# Altium PCB RD3399-20181026.PCBDOC (part 1 of 2)
Units mil, origin at the board's own origin, x right, y up, seen from the top; angles counter-clockwise.
Board outline 4930.59 x 3741.42 mil, 4 copper layers (TOP, GND, POWER, BOTTOM), stack 28.234 mil thick; 208 components, 334 nets, 961 pads, 292 vias.
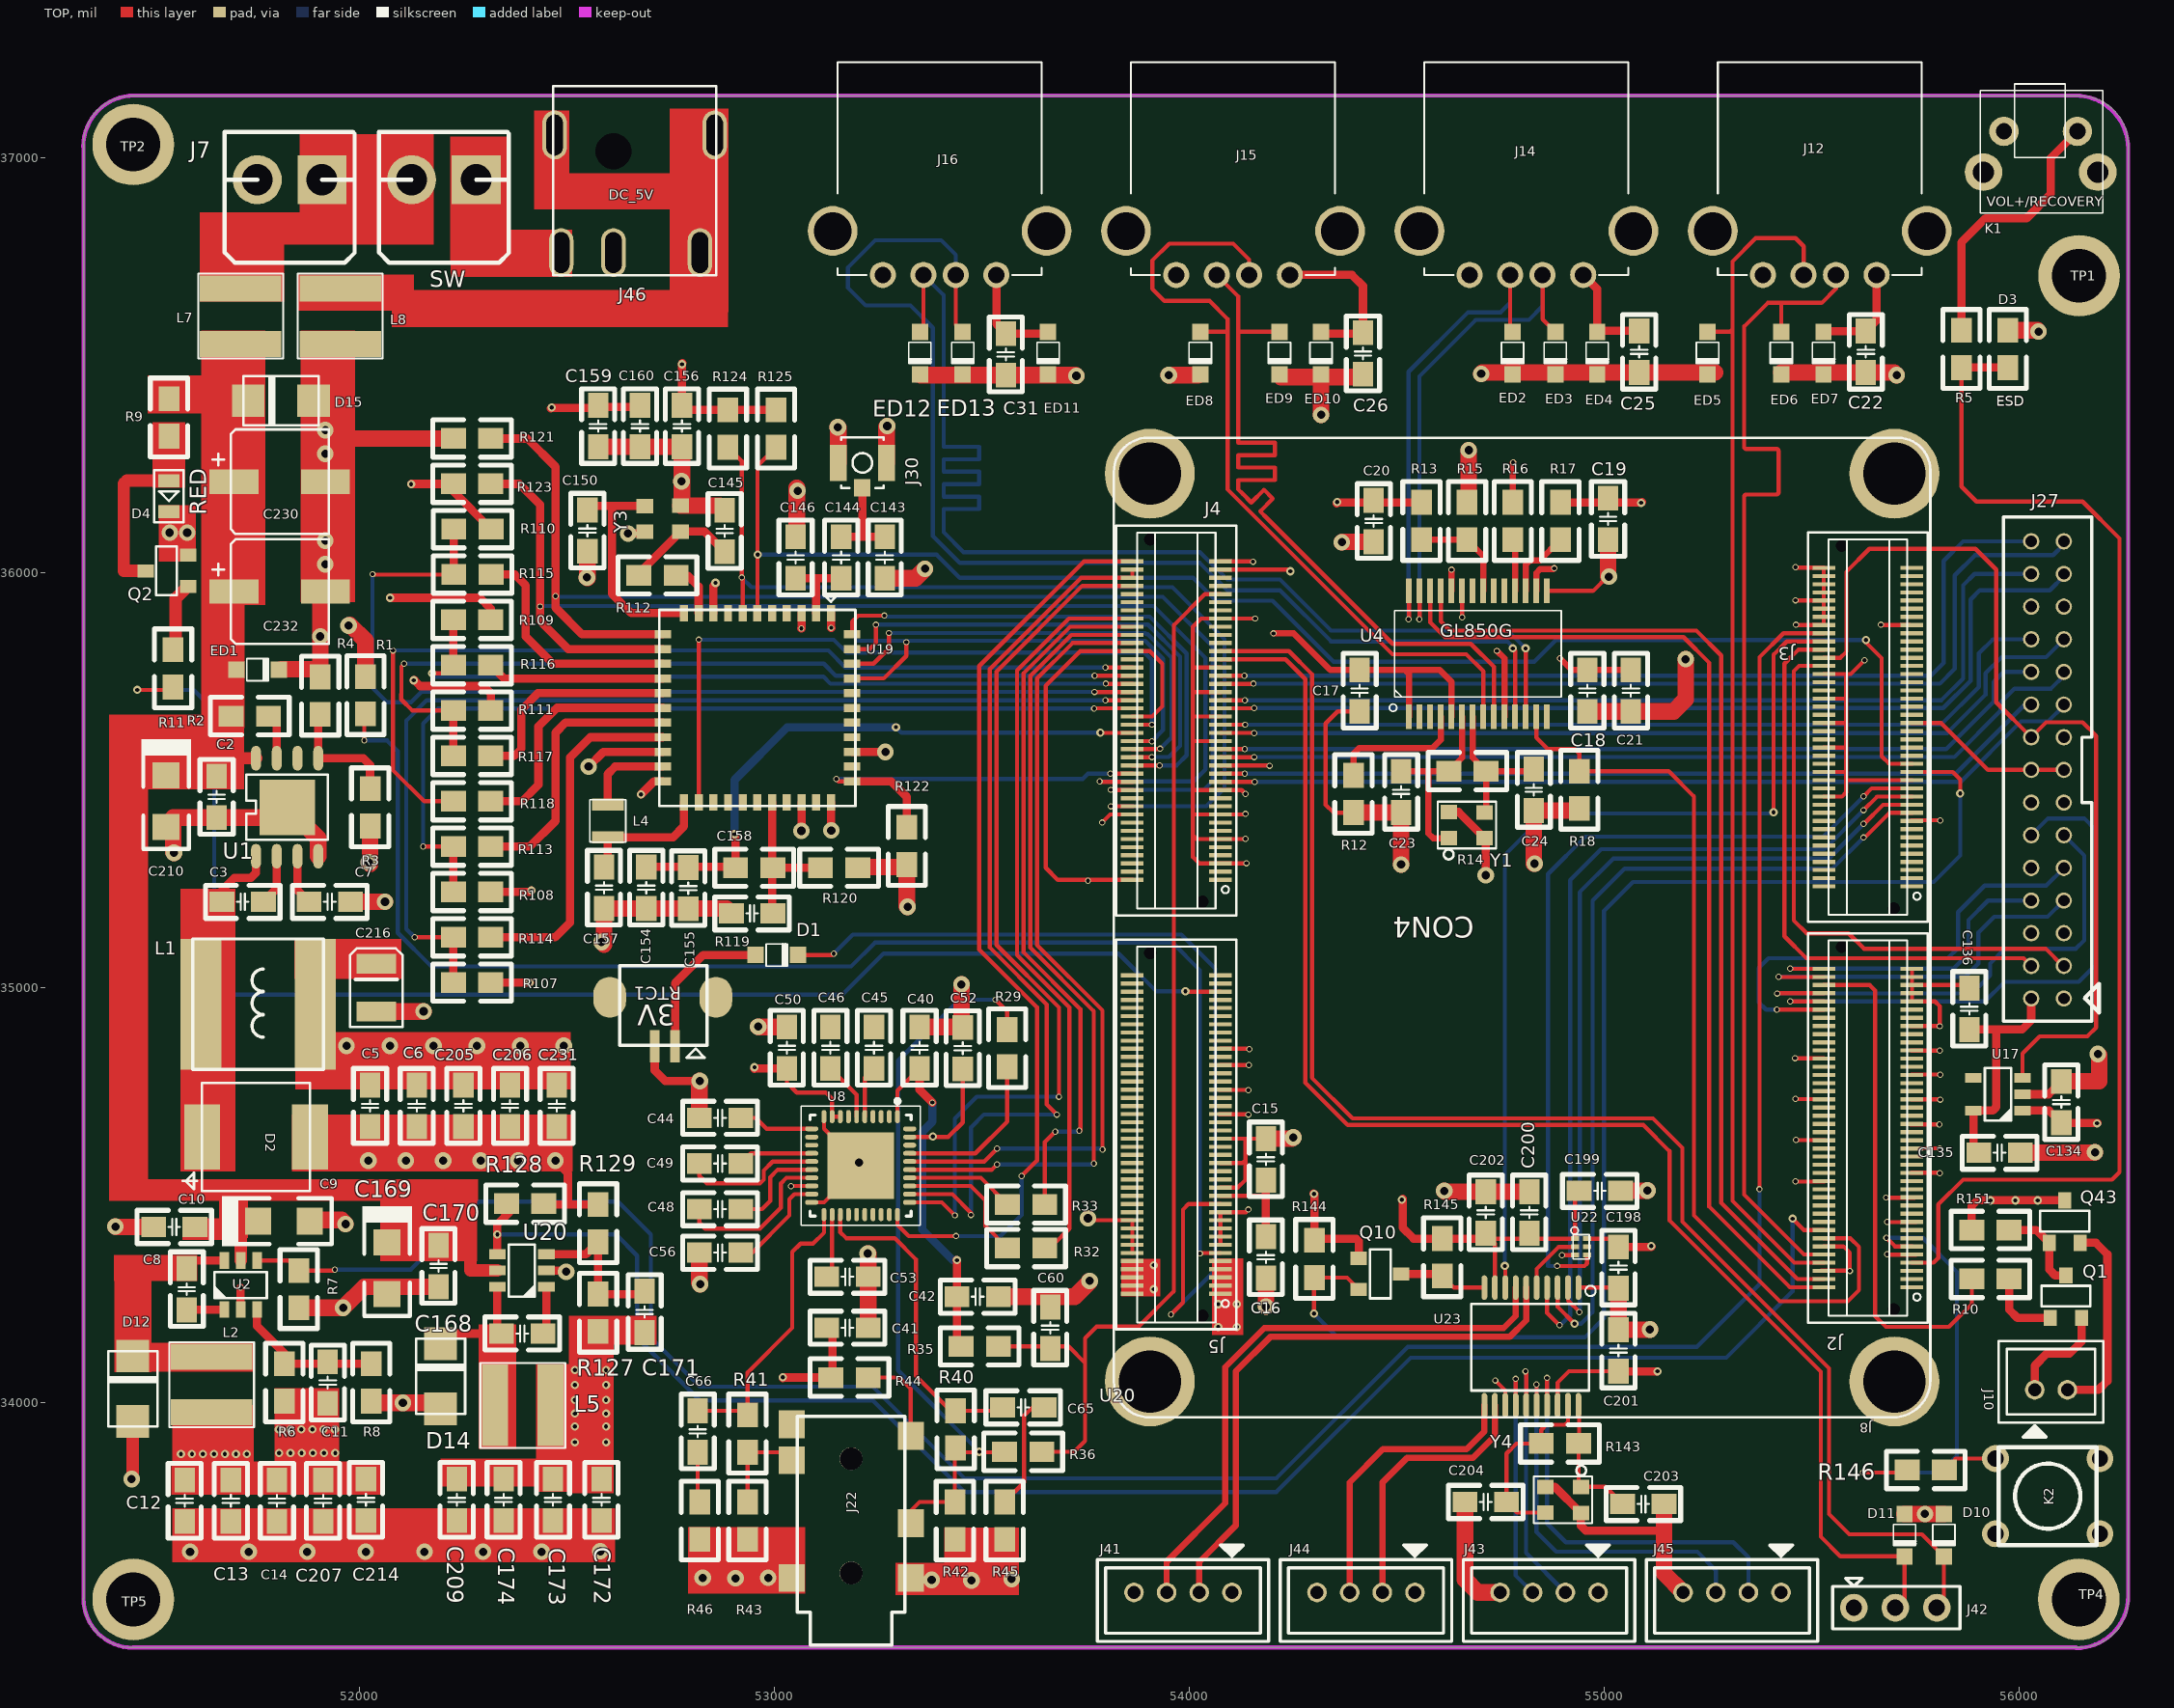
[diagram p0: TOP view]
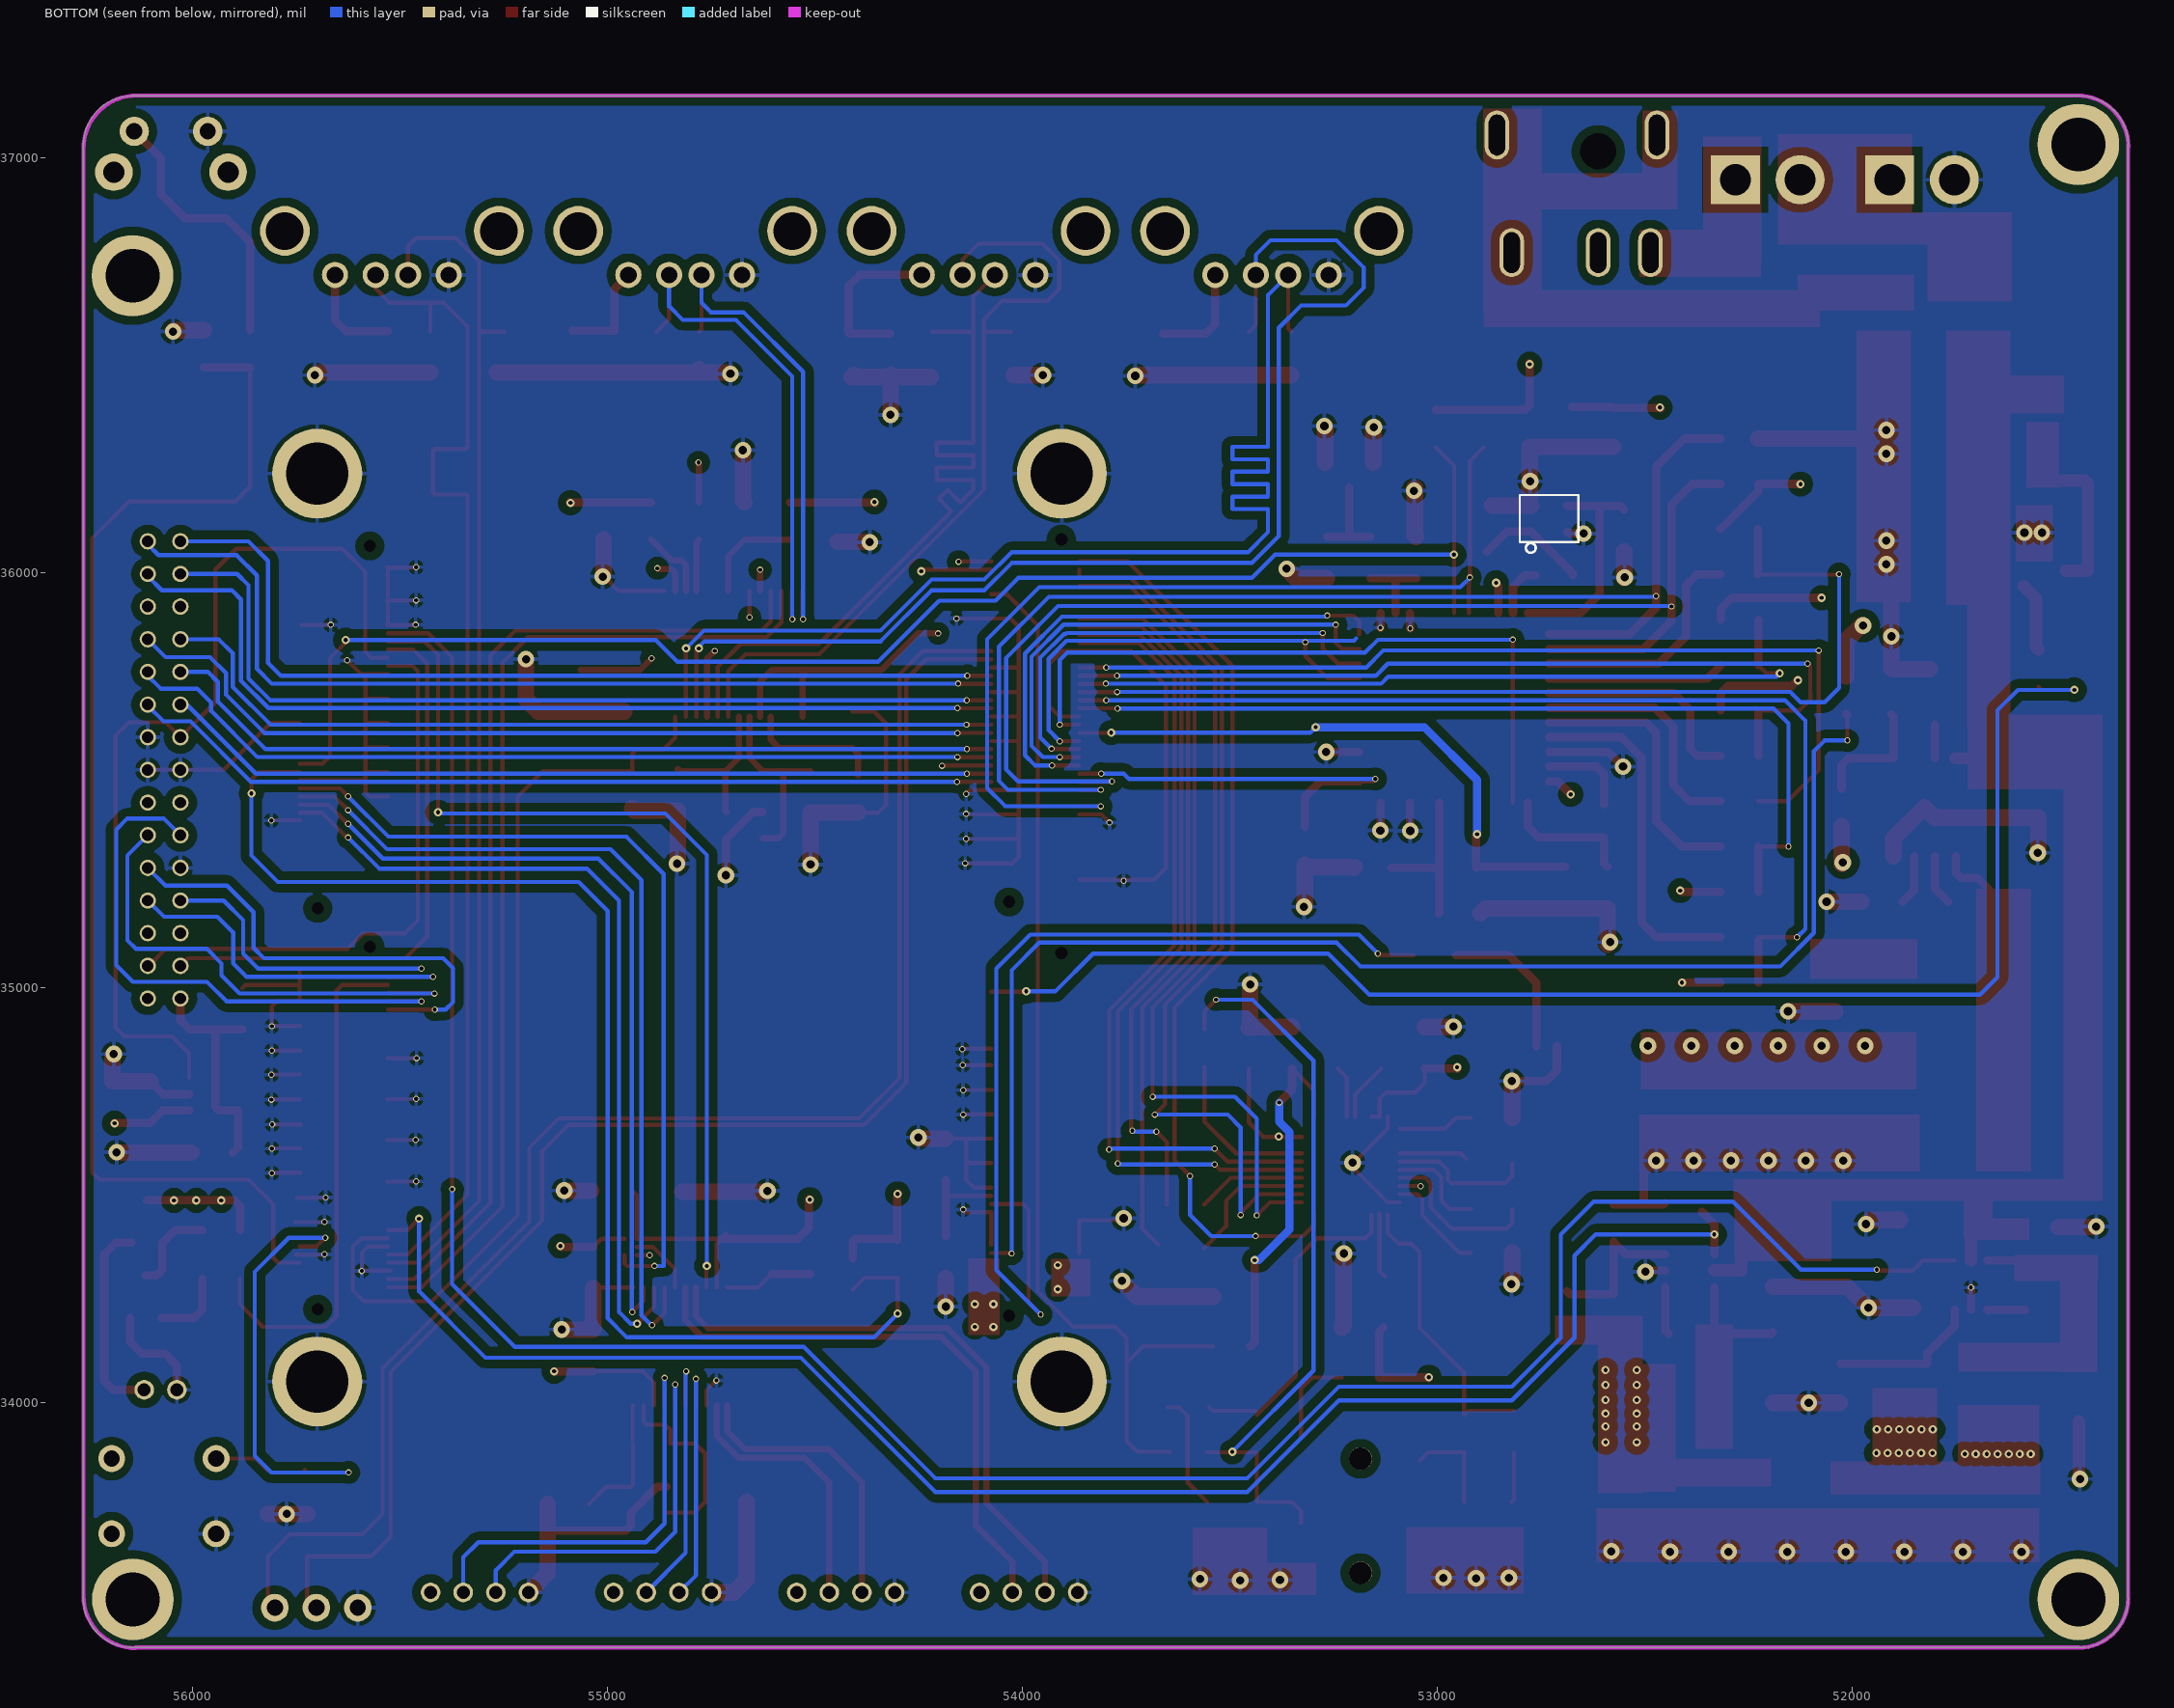
[diagram p1: BOTTOM view, seen from below]
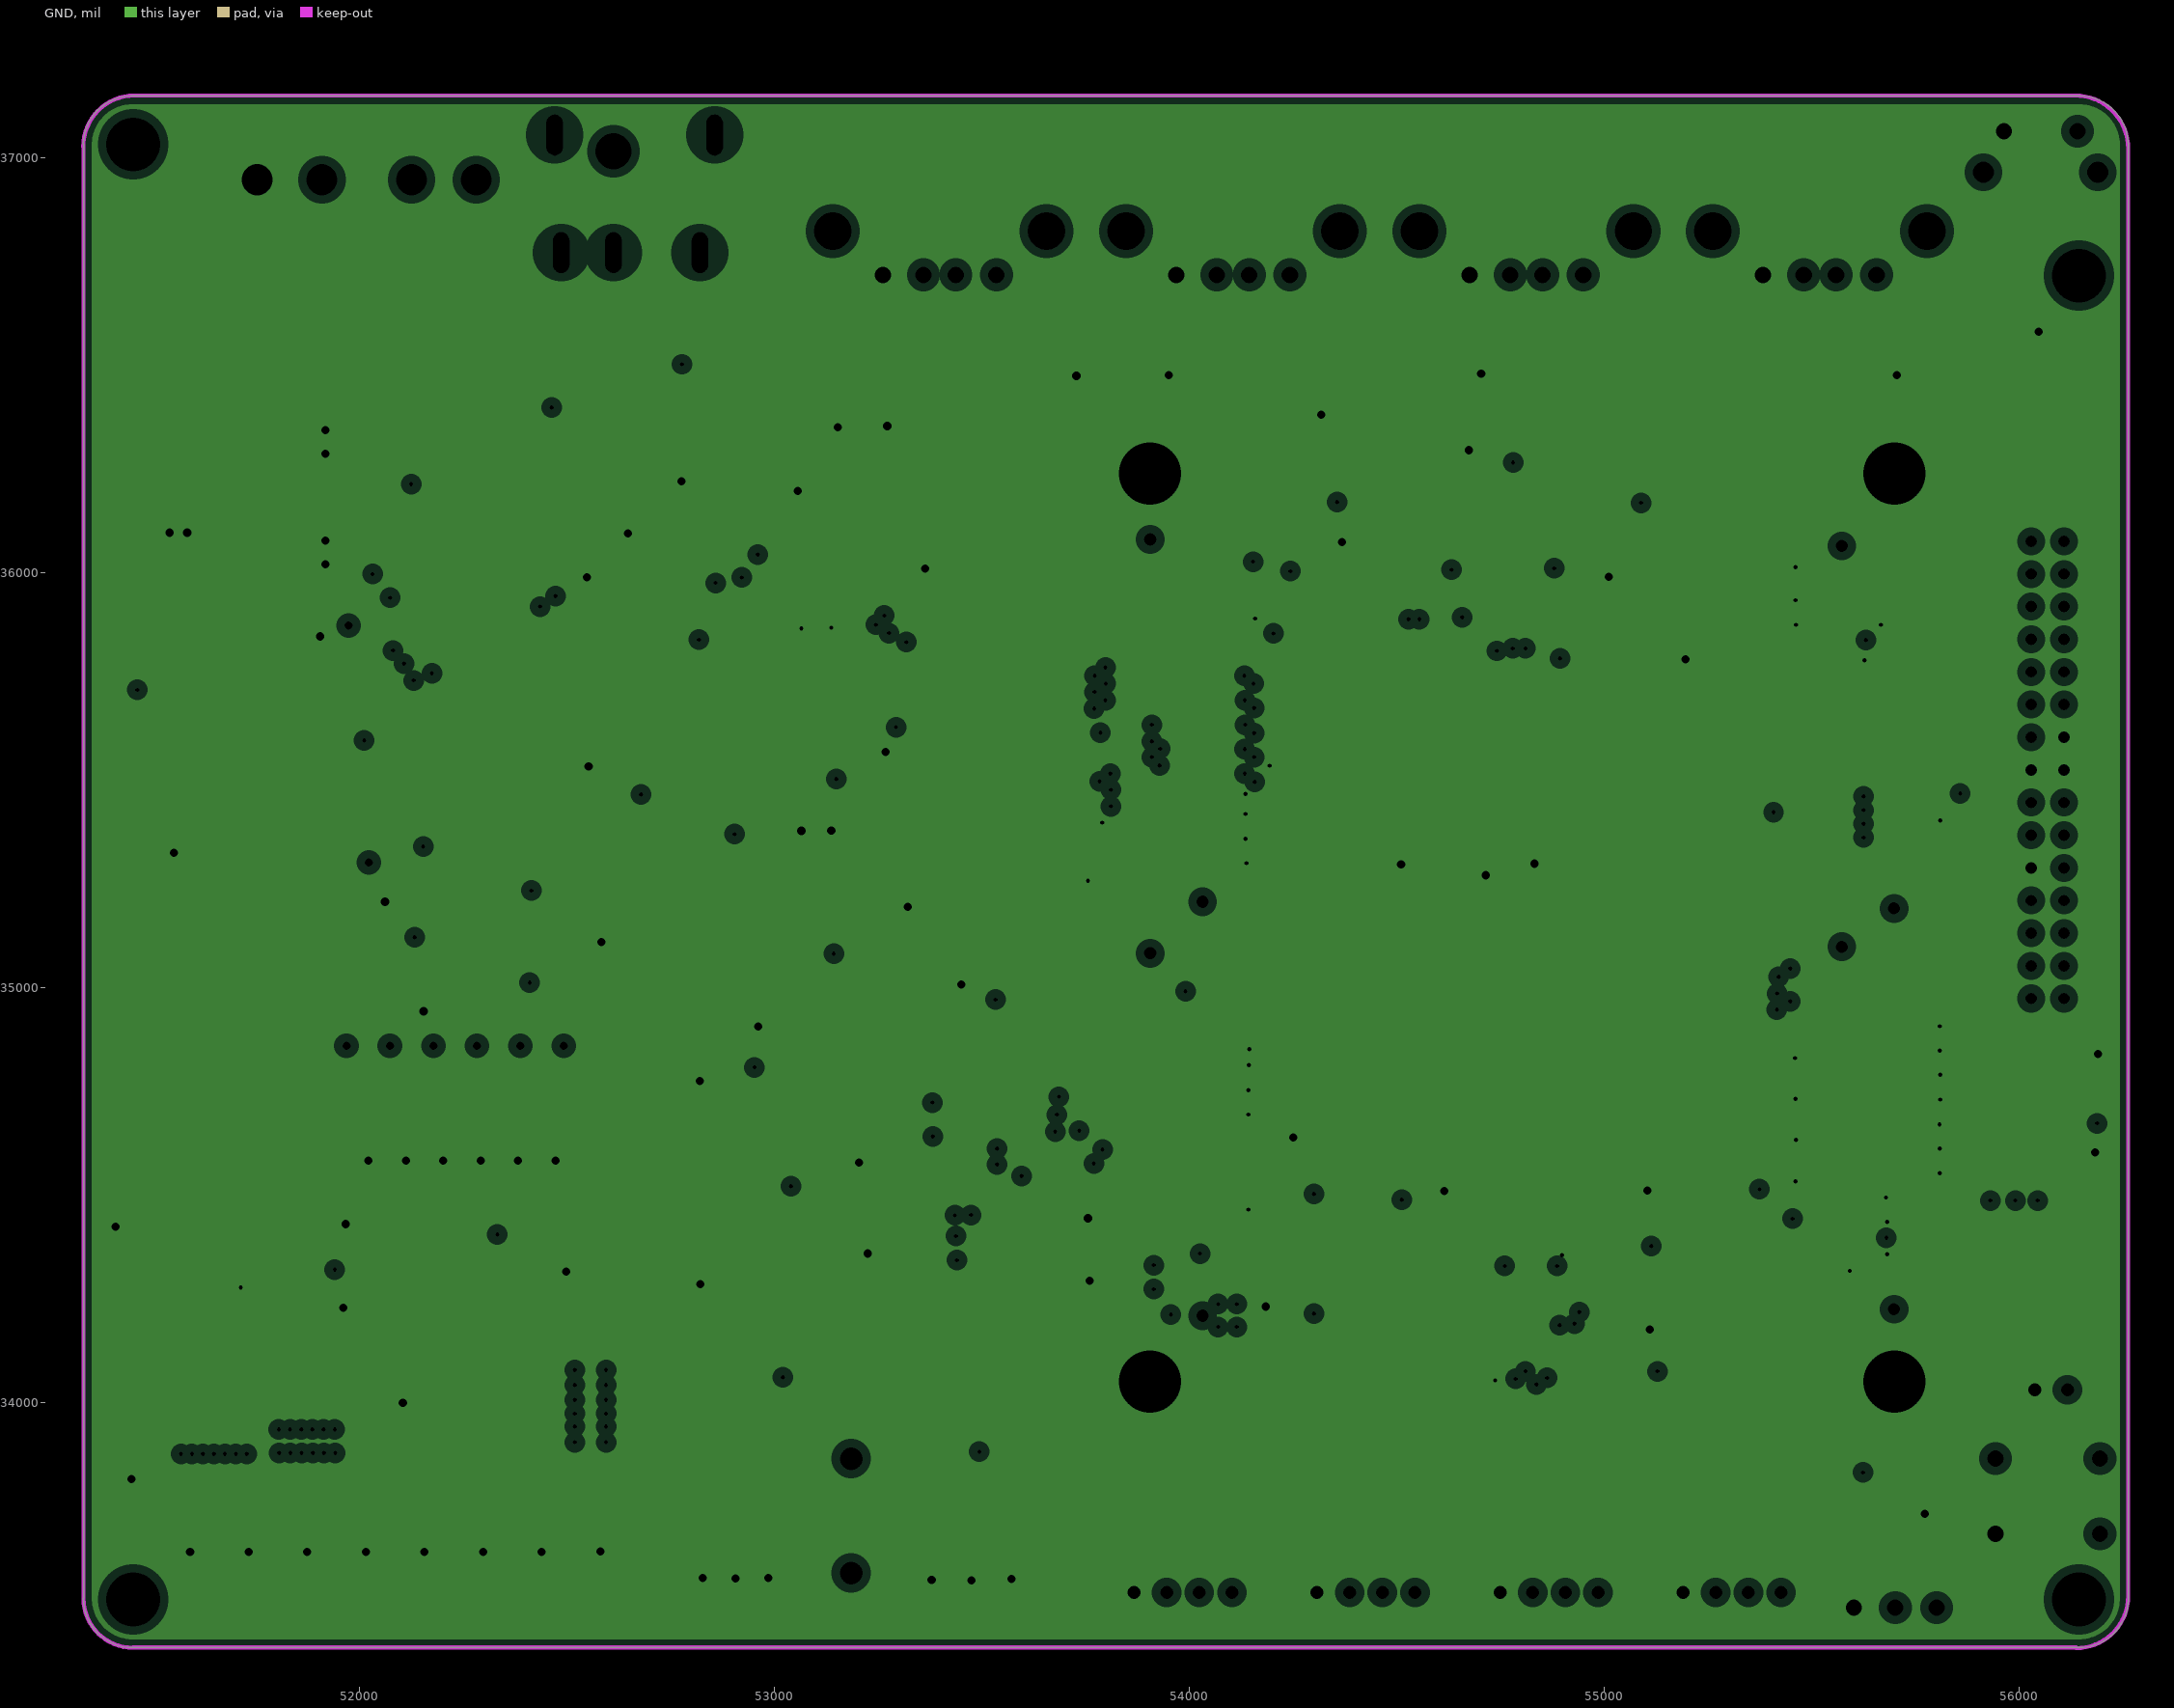
[diagram p2: GND, clearances drawn from the general rule]
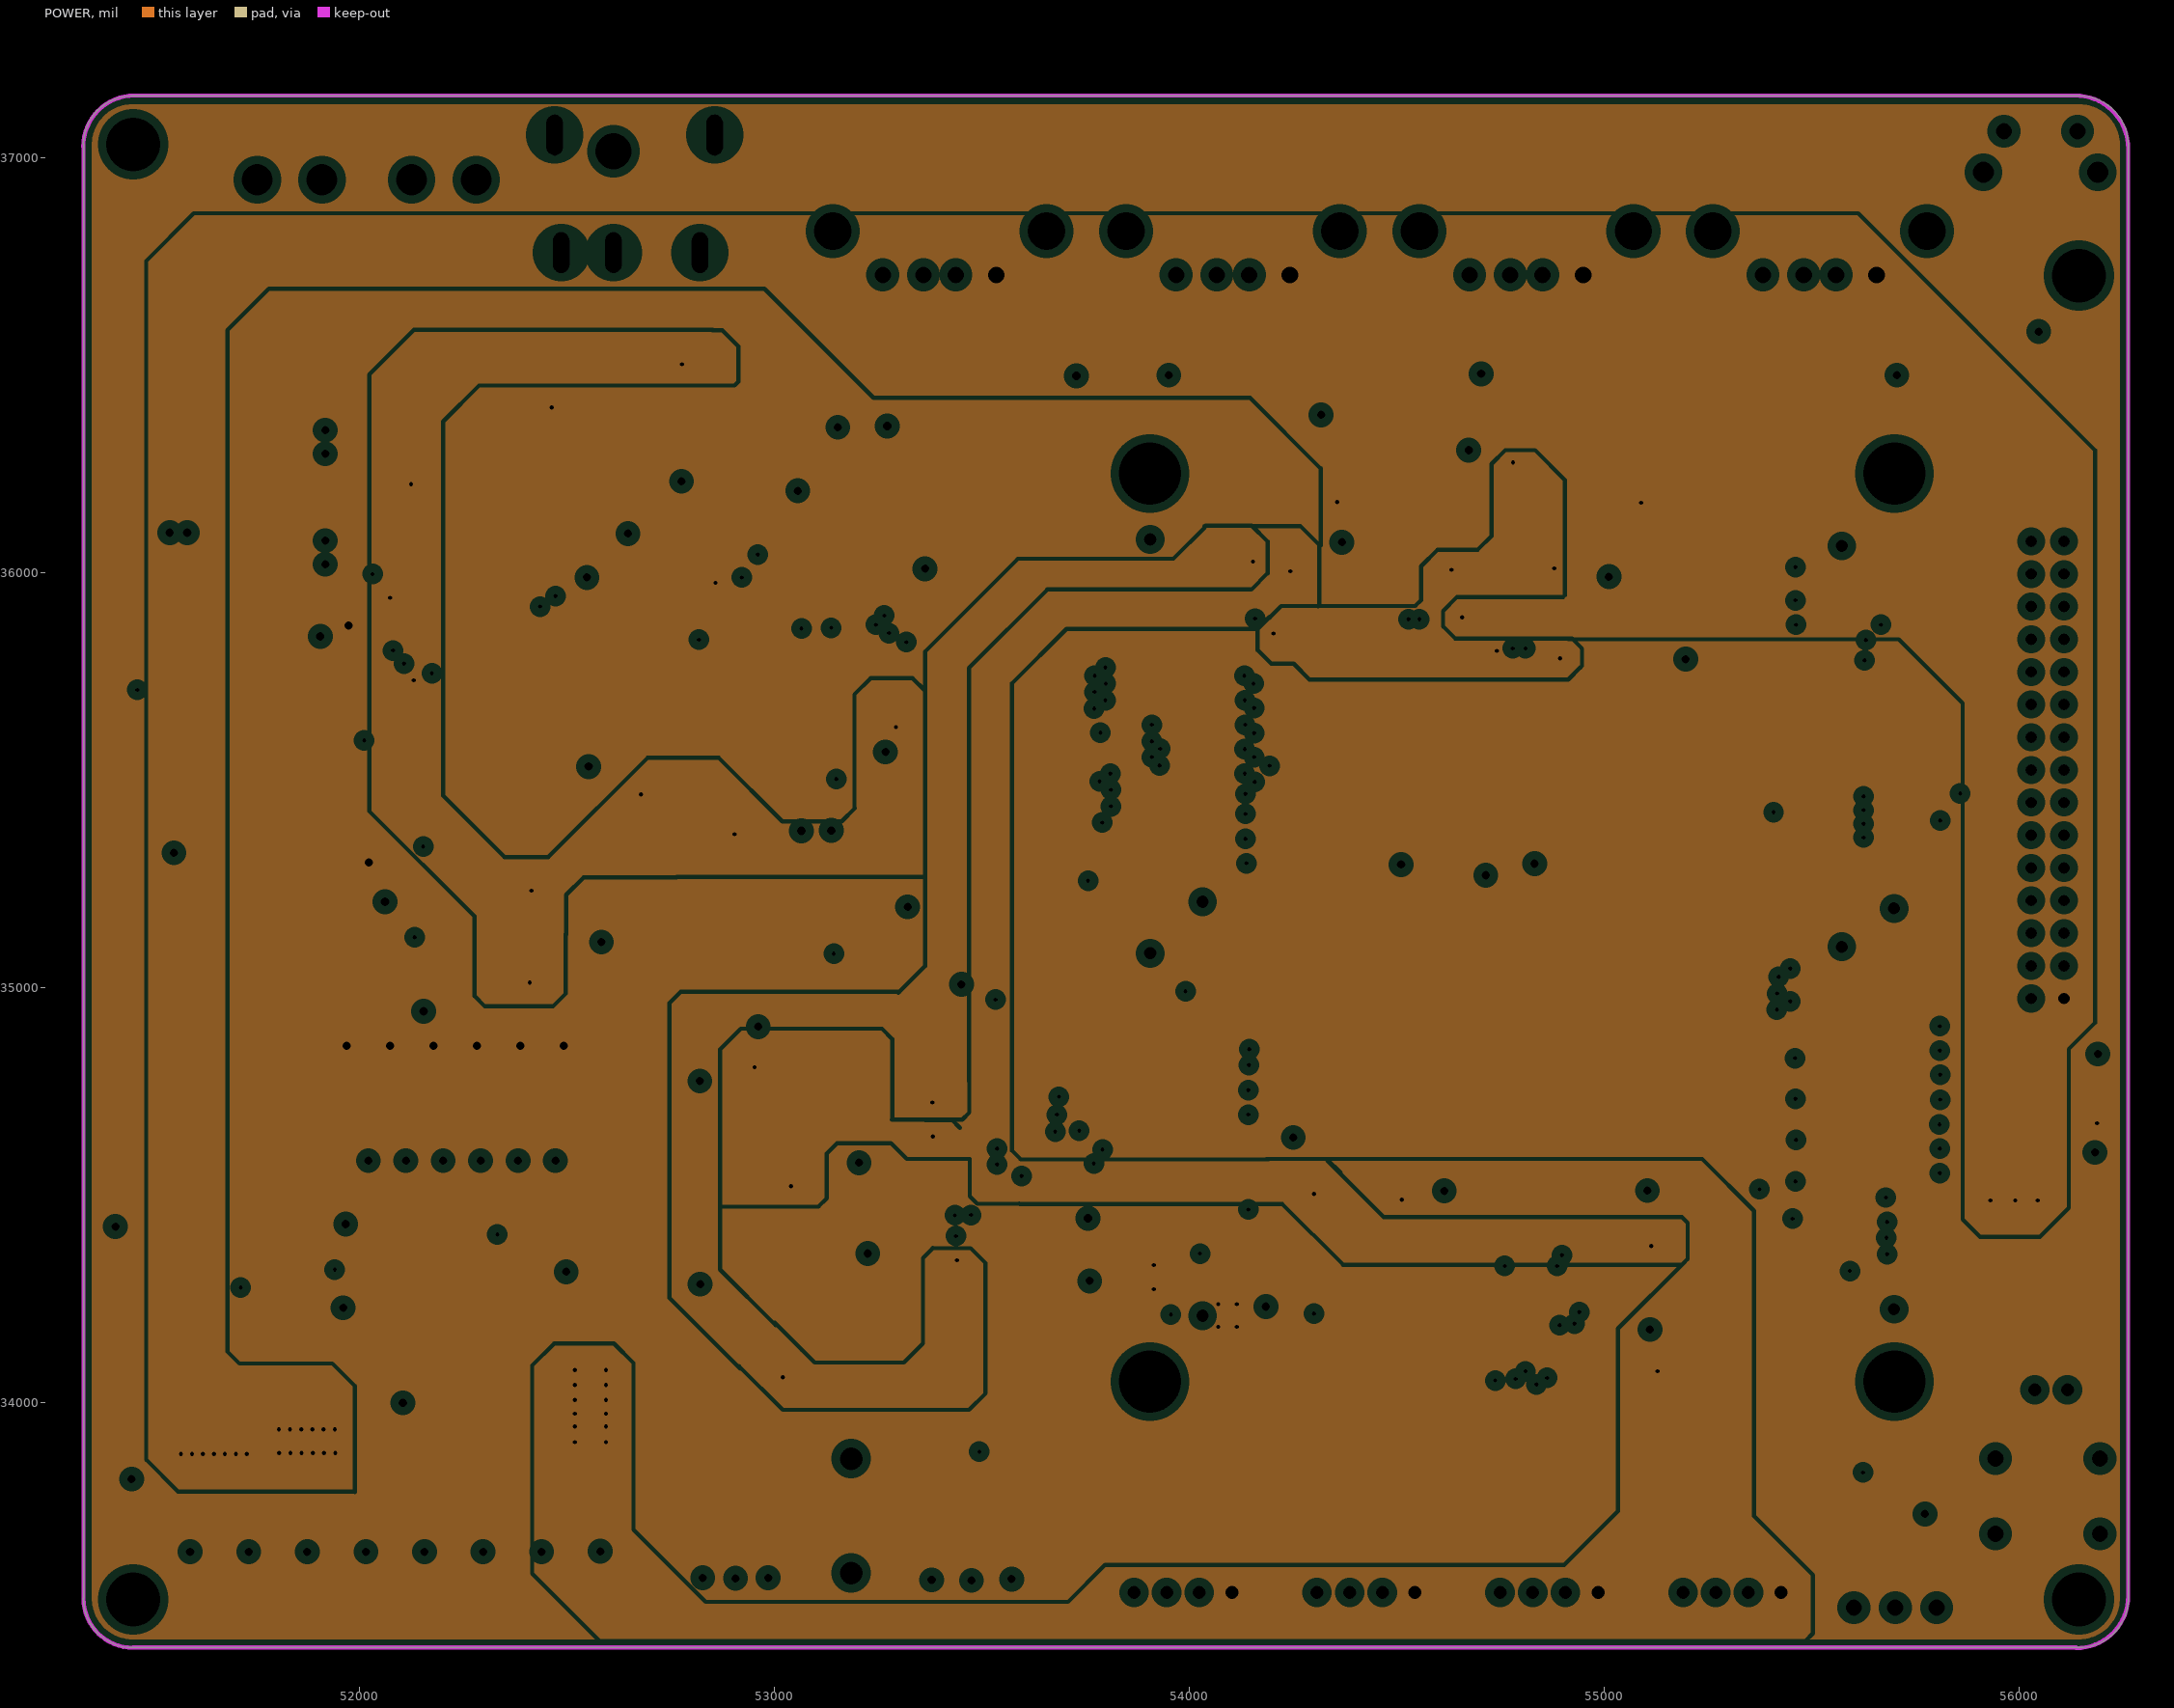
[diagram p3: POWER, clearances drawn from the general rule]

## Layer stack, top to bottom
Top Solder: solder mask 0.4, Solder Resist, Dk 3.5
TOP: signal copper 1.2
Dielectric1: core 8, FR-4, Dk 4.5
GND: plane copper 1.417, net GND
Dielectric 3: prepreg 5, Dk 4.2
POWER: plane copper 1.417
Dielectric 2: core 10, Dk 4.2
BOTTOM: signal copper 1.2
Bottom Solder: solder mask 0.4, Solder Resist, Dk 3.5

## Board outline
51334.06,33516 51334.06,33521.79 cw(c51452.59,33527.33) 51333.93,33527.33 cw(c51334.45,33527.33) 51334.06,33527.67 51334.06,37033.83 cw(c51334.22,37034.32) 51333.71,37034.34 cw(c51452.33,37031.41) 51449.53,37150.03 cw(c51449.82,37149.61) 51449.82,37150.12 56147.64,37150.12 cw(c56147.64,37149.61) 56147.68,37150.12 cw(c56145.65,37031.5) 56264.29,37031.5 56264.29,33524.68 cw(c56263.78,33524.68) 56264.29,33524.64 ccw(c56145.67,33527.59) 56264.29,33524.66 56264.29,33524.64 cw(c56145.67,33527.59) 56145.67,33408.93 51450.1,33408.93 cw(c51449.68,33409.22) 51449.66,33408.71 cw(c51452.59,33527.33) 51334.53,33515.49 cw(c51334.58,33516)

## Design rules (kind name [scope] priority, off if disabled: settings)
Clearance [All] p1: gap=6
FabricationTestPointUsage TestPointUsage [All] p1: valid=0 allowmultiple=FALSE
FabricationTestpoint Testpoint [All] p1: side=3 testpointundercomponent=TRUE minsize=40 maxsize=100 preferedsize=60 minholesize=0 maxholesize=40 preferedholesize=32 testpointgrid=1 allowsidetop=TRUE allowsidebottom=TRUE usegrid=TRUE gridtolerance=0.01
HoleSize [All] p1: absolutevalues=TRUE maxlimit=150 minlimit=1 maxpercent=80.000 minpercent=20.000
HoleToHoleClearance [All] p1: gap=6 allowstackedmicrovias=TRUE
MinimumSolderMaskSliver [All] p1: minsoldermaskwidth=6
PlaneClearance [All] p1: clearance=20
PlaneConnect [All] p1: planeconnectstyle=Relief reliefexpansion=20 reliefentries=4 reliefconductorwidth=10 reliefairgap=10
PolygonConnect [All] p1: connectstyle=Relief reliefconductorwidth=10 reliefentries=4 polygonreliefangle="90 Angle" airgapwidth=10
RoutingVias RoutingVias_1 [All] p1: holewidth=10 width=20 viastyle="Through Hole" minholewidth=10 minwidth=6 maxholewidth=30 maxwidth=40
RoutingVias [All] p2: holewidth=10 width=20 viastyle="Through Hole" minholewidth=10 minwidth=6 maxholewidth=30 maxwidth=40
SilkToSolderMaskClearance SilkscreenOverComponentPads [IsPad] p1: minsilkscreentomaskgap=10 clearancetoexposedcopper=TRUE
SolderMaskExpansion [All] p1: expansion=4
Width Width_1 [All] p1: maxlimit=50 minlimit=10 preferedwidth=10
22 further rules are at their usual default settings.

## Classes and differential pairs
component class 01: J2 J3 J4 J5 J8 R146
component class 02: C2 C3 C5 C6 C7 C8 C9 C10 C11 C12 C13 C14 C15 C16 C205 C206 C207 C210 C214 C216 C230 C231 C232 D1 D2 D3 D4 D12 D15 ED1 J7 J10 J46 K1 K2 L1 L2 L7 L8 Q1 Q2 Q43 R1 R2 R3 R4 R5 R6 R7 R8 R9 R10 R11 R151 RTC1 SW TP1 TP2 TP4 TP5 U1 U2
component class 03: C17 C18 C19 C20 C21 C22 C23 C24 C25 C26 C31 ED2 ED3 ED4 ED5 ED6 ED7 ED8 ED9 ED10 ED11 ED12 ED13 J12 J14 J15 J16 R12 R13 R14 R15 R16 R17 R18 U4 Y1
component class 04: C40 C41 C42 C44 C45 C46 C48 C49 C50 C52 C53 C56 C60 C65 C66 J22 R29 R32 R33 R35 R36 R40 R41 R42 R43 R44 R45 R46 U8
component class 07: C134 C135 C136 C168 C169 C170 C171 C172 C173 C174 C209 D14 J27 L5 R127 R128 R129 U17 U20
component class 09: C143 C144 C145 C146 C150 C154 C155 C156 C157 C158 C159 C160 J30 L4 R107 R108 R109 R110 R111 R112 R113 R114 R115 R116 R117 R118 R119 R120 R121 R122 R123 R124 R125 U19 Y3
component class 13: C198 C199 C200 C201 C202 C203 C204 D10 D11 J41 J42 J43 J44 J45 Q10 R143 R144 R145 U22 U23 Y4

## Components (designator, comment, footprint, x,y, rotation, side; value= is the part's Value field where it differs from the comment)
C2 "0.1uF" 0805C 51655,35410 r90 top
C3 "0.1uF" 0805C 51768,35207 r180 top
C5 "0.1uF" 0805C 52025,34665 r90 top
C6 "22uF" 0805C 52137.5,34765 r270 top
C7 "1uF" 0805C 51978,35207 r180 top
C8 "100NF" 0805C 51583,34223 r90 top
C9 "22uF 16V" 3216C 51755,34437 r180 top
C10 "100NF" 0805C 51603,34423 r180 top
C11 "100pF" 0805C 51923,33998 r90 top
C12 "22uF" 0805C 51578,33813 r270 top
C13 "22uF" 0805C 51689.25,33813 r270 top
C14 "100NF" 0805C 51800.5,33813 r270 top
C15 "0.1uF" 0805C 54185,34536 r90 top
C16 "10uF" 0805C 54185,34400 r270 top
C17 "0.1uF" 0805C 54411,35766 r270 top
C18 "10uF" 0805C 54960,35766 r270 top
C19 "10uF" 0805C 55010,36180 r270 top
C20 "0.1uF" 0805C 54445,36175 r270 top
C21 "0.1uF" 0805C 55065,35766 r270 top
C22 "10uF" 0805C 55631.44,36583 r270 top
C23 "27pF" 0805C 54511,35522 r270 top
C24 "27pF" 0805C 54831,35527 r270 top
C25 "10uF" 0805C 55085,36583 r270 top
C26 "10uF" 0805C 54419,36579 r270 top
C31 "10uF" 0805C 53558,36577 r270 top
C40 "4.7uF/10V" 0805C 53350,34805 r90 top
C41 "0.1uF/10V" 0805C 53126,34180 r0 top
C42 "0.1uF/10V" 0805C 53440,34255 r0 top
C44 "4.7uF/10V" 0805C 52819,34686 r0 top
C45 "1uF/10V" 0805C 53240,34905 r270 top
C46 "1uF/10V" 0805C 53135,34905 r270 top
C48 "2.2uF/10V" 0805C 52919,34466 r180 top
C49 "2.2uF/10V" 0805C 52919,34576 r180 top
C50 "4.7uF/10V" 0805C 53030,34805 r90 top
C52 "0.1uF/10V" 0805C 53454,34804 r90 top
C53 "2.2uF/10V" 0805C 53126,34303 r0 top
C56 "2.2uF/10V" 0805C 52919,34361 r180 top
C60 "0.1uF/10V" 0805C 53665,34130 r90 top
C65 "10NF/25V" 0805C 53650,33988 r180 top
C66 "10NF/25V" 0805C 52815,33880 r90 top
C134 "4.7uF" 0805C 56103,34674 r90 top
C135 "4.7uF" 0805C 55904,34602 r0 top
C136 "0.1uF" 0805C 55881,34899 r90 top
C143 "NC" 0805C 53266,36087 r270 top
C144 "0R" 0805C 53161,35987 r90 top
C145 "10pF" 0805C 52880,36051 r90 top
C146 "NC" 0805C 53051,35987 r90 top
C150 "10pF" 0805C 52549,36052 r90 top
C154 "4.7uF" 0805C 52691,35191 r90 top
C155 "0.1uF" 0805C 52792,35190 r90 top
C156 "1uF" 0805C 52777,36404 r270 top
C157 "4.7uF" 0805C 52589,35191 r90 top
C158 "1uF" 0805C 52896,35179 r0 top
C159 "10uF" 0805C 52575,36404 r270 top
C160 "0.1uF" 0805C 52676,36304 r90 top
C168 "100NF" 0805C 52442,34166 r180 top
C169 "22uF 16V" 3216C 52066,34386 r90 top
C170 "100NF" 0805C 52190,34379 r270 top
C171 "100pF" 0805C 52687,34168 r90 top
C172 "22uF" 0805C 52583,33815 r270 top
C173 "22uF" 0805C 52466,33815 r270 top
C174 "100NF" 0805C 52347,33815 r270 top
C198 "0.1uF" 0805C 55035,34375 r270 top
C199 "0.1uF" 0805C 54940,34510 r0 top
C200 "10uF" 0805C 54820,34408 r90 top
C201 "100NF" 0805C 55035,34075 r90 top
C202 "100NF" 0805C 54715,34408 r90 top
C203 "27pF" 0805C 55045,33755 r0 top
C204 "27pF" 0805C 54765,33760 r180 top
C205 "22uF" 0805C 52250,34765 r270 top
C206 "22uF" 0805C 52362.5,34765 r270 top
C207 "22uF" 0805C 51911.75,33813 r270 top
C209 "22uF" 0805C 52234,33815 r270 top
C210 "22uF 16V" 3216C 51533,35512 r90 top
C214 "22uF" 0805C 52015,33815 r270 top
C216 "220uF 10V" CASE-B 52040,35000 r270 top
C230 "220uF 16V" CAP-6X6 51807.07,36220 r0 top
C231 "22uF" 0805C 52475,34765 r270 top
C232 "220uF 16V" CAP-6X6 51807.07,35955 r0 top
D1 "IN4148" SOD-323 53006,35079 r0 top
D2 "B530C" DO-214AB 51750,34640 r180 top
D3 "ESD" 0805 55974,36585 r270 top
D4 "RED" LED0805 51540,36185 r270 top
D10 "ESD" SOD-323 55820,33680 r270 top
D11 "ESD" SOD-323 55725,33680 r270 top
D12 "SS34" DO-214AC 51453,34033 r90 top
D14 "SS34" DO-214AC 52195,34063 r90 top
D15 "M7" DO-214AC 51810,36415 r180 top
ED1 "ESD" SOD-323 51754,35767 r0 top
ED2 "ESD" SOD-323 54780,36530 r270 top
ED3 "ESD" SOD-323 54883,36530 r270 top
ED4 "ESD" SOD-323 54984,36530 r270 top
ED5 "ESD" SOD-323 55250,36530 r270 top
ED6 "ESD" SOD-323 55427.81,36530 r270 top
ED7 "ESD" SOD-323 55529.63,36530 r270 top
ED8 "ESD" SOD-323 54027,36530 r270 top
ED9 "ESD" SOD-323 54218,36530 r270 top
ED10 "ESD" SOD-323 54318,36530 r270 top
ED11 "ESD" SOD-323 53660,36530 r270 top
ED12 "ESD" SOD-323 53351,36530 r270 top
ED13 "ESD" SOD-323 53454,36530 r270 top
J2 "AXK5F80337YG" AXK5F80337YG 55636.5,34661.61 r180 top
J3 "AXK5F80337YG" AXK5F80337YG 55636.5,35628.15 r180 top
J4 "AXK5F80337YG" AXK5F80337YG 53969.17,35643.9 r180 top
J5 "AXK5F80337YG" AXK5F80337YG 53969.17,34645.87 r180 top
J7 "Header 2" VH3.96*2 51909,36948 r180 top
J8 "CON4" DIP-CORE 55658.74,34007.28 r180 top locked
J10 "FIN" SIP-2P-2D0 56074,34032 r0 top
J12 "HOST0" USB-A 55520,36960 r0 top
J14 "USB_B" USB-A 54812.57,36960 r0 top
J15 "HOST3" USB-A 54105.14,36960 r0 top
J16 "HOST4" USB-A 53397.72,36960 r0 top
J22 "PHONE" PJ-3537 53185,33695 r90 top
J27 "MIPI0" IDC30P-2D0 56079,35527 r180 top
J30 "RF_3P" ANT-2 53212,36256 r0 top
J41 "UART8" SIP-4P-2D0 53985,33540 r180 top
J42 "DEBUG" SIP-3P-2D54-DEBUG 55705,33515 r0 top
J43 "UART5" SIP-4P-2D0 54867.68,33540 r180 top
J44 "UART6" SIP-4P-2D0 54426.34,33540 r180 top
J45 "UART7" SIP-4P-2D0 55309.02,33540 r180 top
J46 "DC_5V" DC044A 52663,36945 r270 top
K1 "VOL+/RECOVERY" TS-039 56053,37104 r180 top
K2 "RST" TS-037-DIP 56070,33774 r90 top
L1 "4.7uH 4A" L8D28 51755,34960 r0 top
L2 "2.2uH" L5D18 51643,34043 r270 top
L4 "2.2uH" IND2520 52598,35402 r90 top
L5 "2.2uH" l5d18 52393,33993 r0 top
L7 "2.2uH" L5D18 51713,36619 r270 top
L8 "2.2uH" L5D18 51953,36619 r270 top
Q1 "MMBT3904" SOT-23 56114,34255 r0 top
Q2 "MMBT3904" SOT-23 51535,36005 r90 top
Q10 "2SK3018" SOT-23 54460,34310 r270 top
Q43 "GM2307" SOT-23 56111,34436 r0 top
R1 "0R" 0805 52014,35660 r90 top
R2 "100K" 0805 51690,35655 r0 top
R3 "40.2K 1%" 0805 52025.13,35480 r270 top
R4 "8.2K" 0805 51905,35659 r90 top
R5 "10R" 0805 55862,36495 r90 top
R6 "75K 1%" 0805 51818,34003 r90 top
R7 "100K" 0805 51853,34228 r90 top
R8 "10K 1%" 0805 52028,34093 r270 top
R9 "4.7K" 0805 51540,36420 r270 top
R10 "1K" 0805 55977,34297.64 r180 top
R11 "4.7K" 0805 51550,35725 r90 top
R12 "680R 1%" 0805 54396,35422 r90 top
R13 "10K" 0805 54560,36080 r90 top
R14 "1M" 0805 54716,35522 r180 top
R15 "20K" 0805 54670,36080 r90 top
R16 "100K" 0805 54780,36080 r90 top
R17 "510K" 0805 54895,36080 r90 top
R18 "47K" 0805 54941,35522 r270 top
R29 "1K" 0805 53561,34899 r270 top
R32 "33R" 0805 53652,34372 r180 top
R33 "33R" 0805 53652,34477 r180 top
R35 "NC" 0805 53450,34135 r0 top
R36 "1K" 0805 53555,33881 r0 top
R40 "22R" 0805 53437,33890 r90 top
R41 "22R" 0805 52935,33880 r90 top
R42 "10K" 0805 53435,33760 r270 top
R43 "10K" 0805 52935,33760 r270 top
R44 "1K" 0805 53226,34060 r180 top
R45 "470R" 0805 53555,33760 r270 top
R46 "470R" 0805 52820,33760 r270 top
R107 "47K" 0805 52316,35012 r180 top
R108 "47K" 0805 52316,35230.65 r180 top
R109 "47K" 0805 52316,35886.58 r180 top
R110 "47K" 0805 52317,36105.23 r180 top
R111 "47K" 0805 52316,35667.94 r180 top
R112 "100R" 0805 52673,35994 r0 top
R113 "22R" 0805 52226,35340.1 r0 top
R114 "22R" 0805 52226,35121.45 r0 top
R115 "22R" 0805 52227,35996.03 r0 top
R116 "22R" 0805 52226,35777.39 r0 top
R117 "22R" 0805 52226,35558.74 r0 top
R118 "22R" 0805 52226,35449.42 r0 top
R119 "0R" 0805 52996,35289 r180 top
R120 "NC/0R" 0805 53201,35289 r180 top
R121 "NC/10K" 0805 52226,36324 r0 top
R122 "NC/10K" 0805 53319,35297 r90 top
R123 "NC/10K" 0805 52226,36214.68 r0 top
R124 "NC/10K" 0805 52888,36393 r270 top
R125 "NC/10K" 0805 53004,36393 r270 top
R127 "100K 1%" 0805 52575,34171 r90 top
R128 "100K" 0805 52354,34479 r0 top
R129 "22.1K 1%" 0805 52575,34387 r90 top
R143 "1M" 0805 54849,33901 r0 top
R144 "10K" 0805 54302,34391 r270 top
R145 "5.1K" 0805 54610,34395 r270 top
R146 "4.7K" 0805 55821,33837 r180 top
R151 "100K" 0805 55887,34416 r0 top
RTC1 "3V" 12505WR2 52731,34937 r180 top
SW "Header 2" VH3.96*2 52281,36948 r180 top
TP1 "T POINT R" SCREW 56145.67,36716.54 r0 top
TP2 "T POINT R" SCREW 51454,37033 r0 top
TP4 "T POINT R" SCREW 56145,33525 r0 top
TP5 "T POINT R" SCREW 51454,33525 r0 top
U1 "MP2482DN" SO-8-A 51825,35435 r0 top
U2 "SY8113B" SOT23-6 51713,34283 r270 top
U4 "GL850G" GL850G 54690,35805 r0 top
U8 "ALC5651" QFN40-0.5 53208,34571 r270 top
U17 "XC6210B332MR-G" SOT23-5 55950,34743 r0 top
U19 "AP6212" AP6XXX 52959,35686 r270 top
U20 "SY8113B" SOT23-6 52391,34318 r0 top
U22 "NLSV1T34AMX1TCG" ULLGA6_1P45X1_0P5MM 54945,34375 r90 top
U23 "WK2124/VK3224/GM8412" WK2124 54830,34135 r180 top
Y1 "12Mhz20pF" Y3025#1 54671,35392 r180 top
Y3 "26MHz-9pF" Y3025#2 52729,36131 r0 top
Y4 "11.0592MHz" Y3025#1 54900,33765 r0 top

## Footprints (in the part's own frame and the unit in brackets; to place one, negate y for a bottom-side part, rotate by r counter-clockwise, add the part's x,y. Pads: shape width x height; smd on the part's side, far side on the other; paste and mask are expansions set on the pad)
0805 [mil]
  rect 60x50 smd: 1(0,-0.06) 2(90,-0.06)
  silkscreen extent -50,-45 140,45
0805C [mil]
  rect 60x49.21 smd: 1(0,0) 2(100,0)
  silkscreen extent -40,-40 140,40
3216C [mm]
  rect 1.6x1.65 smd: 1(0,0) 2(-3.175,0)
  silkscreen extent -4.51,-1.54 2.22,1.52
12505WR2 [mm] "12505WR2"
  rect 0.6x2 smd: 1(-0.75,1.986) 2(0.5,1.986)
  oval 2x2.5 smd: 3(-3.25,-1.014) 4(3.25,-1.014)
  silkscreen extent -2.7,-2.93 2.64,2.69
ANT-2 [mil] "ANT-2"
  rect 39.4x41.3 smd: 1(0,-50.65)
  rect 41.3x86.6 smd: 2(58.1,9.35) 3(-58.1,9.35)
  silkscreen extent -51,-52 51,70
AP6XXX [mm] "AP6XXX"
  rect 1x0.5 smd: 1(-5.512,4.5) 2(-5.512,3.6) 3(-5.512,2.7) 4(-5.512,1.8) 5(-5.512,0.9) 6(-5.512,0) 7(-5.512,-0.9) 8(-5.512,-1.8) 9(-5.512,-2.7) 10(-5.512,-3.6) 11(-5.512,-4.5) 23(6.088,-4.5) 24(6.088,-3.6) 25(6.088,-2.7) 26(6.088,-1.8) 27(6.088,-0.9) 28(6.088,0) 29(6.088,0.9) 30(6.088,1.8) 31(6.088,2.7) 32(6.088,3.6) 33(6.088,4.5)
  rect 0.5x1 smd: 12(-4.212,-5.8) 13(-3.312,-5.8) 14(-2.412,-5.8) 15(-1.512,-5.8) 16(-0.612,-5.8) 17(0.288,-5.8) 18(1.188,-5.8) 19(2.088,-5.8) 20(2.988,-5.8) 21(3.888,-5.8) 22(4.788,-5.8) 34(4.788,5.8) 35(3.888,5.8) 36(2.988,5.8) 37(2.088,5.8) 38(1.188,5.8) 39(0.288,5.8) 40(-0.612,5.8) 41(-1.512,5.8) 42(-2.412,5.8) 43(-3.312,5.8) 44(-4.212,5.8)
  silkscreen extent -6.51,-6 6.29,6
AXK5F80337YG [mm] "AXK5F80337YG"
  rect 1.39x0.254 smd: 1(-2.7,9.75) 2(-2.7,9.25) 3(-2.7,8.75) 4(-2.7,8.25) 5(-2.7,7.75) 6(-2.7,7.25) 7(-2.7,6.75) 8(-2.7,6.25) 9(-2.7,5.75) 10(-2.7,5.25) 11(-2.7,4.75) 12(-2.7,4.25) 13(-2.7,3.75) 14(-2.7,3.25) 15(-2.7,2.75) 16(-2.7,2.25) 17(-2.7,1.75) 18(-2.7,1.25) 19(-2.7,0.75) 20(-2.7,0.25) 21(-2.7,-0.25) 22(-2.7,-0.75) 23(-2.7,-1.25) 24(-2.7,-1.75) 25(-2.7,-2.25) 26(-2.7,-2.75) 27(-2.7,-3.25) 28(-2.7,-3.75) 29(-2.7,-4.25) 30(-2.7,-4.75) 31(-2.7,-5.25) 32(-2.7,-5.75) 33(-2.7,-6.25) 34(-2.7,-6.75) 35(-2.7,-7.25) 36(-2.7,-7.75) 37(-2.7,-8.25) 38(-2.7,-8.75) 39(-2.7,-9.25) 40(-2.7,-9.75) 41(2.7,-9.75) 42(2.7,-9.25) 43(2.7,-8.75) 44(2.7,-8.25) 45(2.7,-7.75) 46(2.7,-7.25) 47(2.7,-6.75) 48(2.7,-6.25) 49(2.7,-5.75) 50(2.7,-5.25) 51(2.7,-4.75) 52(2.7,-4.25) 53(2.7,-3.75) 54(2.7,-3.25) 55(2.7,-2.75) 56(2.7,-2.25) 57(2.7,-1.75) 58(2.7,-1.25) 59(2.7,-0.75) 60(2.7,-0.25) 61(2.7,0.25) 62(2.7,0.75) 63(2.7,1.25) 64(2.7,1.75) 65(2.7,2.25) 66(2.7,2.75) 67(2.7,3.25) 68(2.7,3.75) 69(2.7,4.25) 70(2.7,4.75) 71(2.7,5.25) 72(2.7,5.75) 73(2.7,6.25) 74(2.7,6.75) 75(2.7,7.25) 76(2.7,7.75) 77(2.7,8.25) 78(2.7,8.75) 79(2.7,9.25) 80(2.7,9.75)
  round 0.6 hole 0.75: " "(-1.6,11.1) " "(1.6,-11.1)
  silkscreen extent -3.22,-11.5 2.4,11.5
CAP-6X6 [mm] "CAP-6X6"
  rect 3x1.5 smd: 1(-2.8,0) 2(2.8,0)
  silkscreen extent -4.1,-3.2 3,3.2
CASE-B [mm] "CASE-B"
  rect 1.2x2.4 smd: 1(-1.464,0) 2(1.465,0)
  silkscreen extent -2.4,-1.6 2.4,1.6
DC044A [mm] "DC044A"
  oval 3x1.5 hole 1 slot 2.5 at 0 deg: 2(4.388,4) 3(4.388,-1.3) 4(4.388,-4.5) 5(-2.812,-4.9) 6(-2.812,4.9)
  round 2 hole 2.2: " "(-1.812,-1.3)
  silkscreen extent -5.81,-5 5.79,5
DIP-CORE [mm] "DIP-CORE"
  round 5.5 hole 3.8: 1(-1.06,-1.095) 2(-1.06,-56.695) 3(44.54,-56.695) 4(44.54,-1.095)
  silkscreen extent -3.26,-58.9 46.74,1.1
DO-214AB [mm] "DO-214AB"
  rect 2.2x4 smd: 1(-3.3,0) 2(3.3,0)
  silkscreen extent -3.3,-3.3 4.5,3.3
DO-214AC [mil] "DO-214AC"
  rect 78.7x78.7 smd: 1(-78.7,0) 2(78.7,0)
  silkscreen extent -91,-59 91,59
GL850G [mm] "GL850G"
  rect 0.35x1.5 smd: 1(-4.063,-3.85) 2(-3.413,-3.85) 3(-2.763,-3.85) 4(-2.113,-3.85) 5(-1.463,-3.85) 6(-0.813,-3.85) 7(-0.163,-3.85) 8(0.487,-3.85) 9(1.137,-3.85) 10(1.787,-3.85) 11(2.437,-3.85) 12(3.087,-3.85) 13(3.737,-3.85) 14(4.387,-3.85) 15(4.387,3.85) 16(3.737,3.85) 17(3.087,3.85) 18(2.437,3.85) 19(1.787,3.85) 20(1.137,3.85) 21(0.487,3.85) 22(-0.163,3.85) 23(-0.813,3.85) 24(-1.463,3.85) 25(-2.113,3.85) 26(-2.763,3.85) 27(-3.413,3.85) 28(-4.063,3.85)
  silkscreen extent -5.26,-3.52 5.26,2.65
IDC30P-2D0 [mm] "IDC30P-2D0"
  round 1 hole 0.7: 1(-0.761,14.05) 2(1.238,14.05) 3(-0.761,12.05) 4(1.238,12.05) 5(-0.761,10.05) 6(1.238,10.05) 7(-0.761,8.05) 8(1.238,8.05) 9(-0.761,6.05) 10(1.238,6.05) 11(-0.761,4.05) 12(1.238,4.05) 13(-0.761,2.05) 14(1.238,2.05) 15(-0.761,0.05) 16(1.238,0.05) 17(-0.761,-1.95) 18(1.238,-1.95) 19(-0.761,-3.95) 20(1.238,-3.95) 21(-0.761,-5.95) 22(1.238,-5.95) 23(-0.761,-7.95) 24(1.238,-7.95) 25(-0.761,-9.95) 26(1.238,-9.95) 27(-0.761,-11.95) 28(1.238,-11.95) 29(-0.761,-13.95) 30(1.238,-13.95)
  silkscreen extent -2.91,-15.45 2.94,15.45
IND2520 [mm] "IND2520"
  rect 0.75x1.95 smd: 1(-1,0) 2(1,0)
  silkscreen extent -1.3,-1.1 1.3,1.1
L5D18 [mm] "L5D18"
  rect 1.6x5 smd: 1(-1.7,0) 2(1.7,0)
  silkscreen extent -2.6,-2.6 2.6,2.6
l5d18 [mm] "L5D18"
  rect 1.6x5 smd: 1(-1.7,0) 2(1.7,0)
  silkscreen extent -2.6,-2.6 2.6,2.6
L8D28 [mil] "L8D28"
  rect 98.4x315 smd: 1(-137.8,0) 2(137.8,0)
  silkscreen extent -158,-158 158,158
LED0805 [mm] "LED0805"
  rect 0.8x1.3 smd: 1(-0.95,0) 2(0.95,0)
  silkscreen extent -1.6,-0.9 1.6,0.9
PJ-3537 [mm] "PJ-3537"
  rect 1.7x1.6 smd: 1(-3.001,-3.65) 2(-3.001,3.65) 3(0.349,-3.65) 4(4.2,3.65) 5(5.699,-3.65) 6(6.399,3.65)
  round 1.399 hole 1.399: " "(-2.701,0) " "(4.299,0)
  silkscreen extent -7.1,-3.3 6.9,3.3
QFN40-0.5 [mm]
  oval 0.813x0.292 smd: 1(-3,2.25) 2(-3,1.75) 3(-3,1.25) 4(-3,0.75) 5(-3,0.25) 6(-3,-0.25) 7(-3,-0.75) 8(-3,-1.25) 9(-3,-1.75) 10(-3,-2.25) 21(3,-2.25) 22(3,-1.75) 23(3,-1.25) 24(3,-0.75) 25(3,-0.25) 26(3,0.25) 27(3,0.75) 28(3,1.25) 29(3,1.75)
  oval 0.292x0.813 smd: 11(-2.25,-3) 12(-1.75,-3) 13(-1.25,-3) 14(-0.75,-3) 15(-0.25,-3) 16(0.25,-3) 17(0.75,-3) 18(1.25,-3) 19(1.75,-3) 20(2.25,-3) 31(2.25,3) 32(1.75,3) 33(1.25,3) 34(0.75,3) 35(0.25,3) 36(-0.25,3) 37(-0.75,3) 39(-1.75,3) 40(-2.25,3)
  oval 0.8x0.3 smd: 30(3,2.25)
  oval 0.3x0.8 smd: 38(-1.25,3)
  rect 4.064x4.064 smd: 41(0,0)
  silkscreen extent -4.07,-3.65 3.65,3.65
SCREW [mm] "SCREW"
  round 5 hole 3.3: 1(0,0)
SIP-2P-2D0 [mm] "SIP-2P-2D0"
  round 1.2 hole 0.8: 1(-0.895,-0.043) 2(1.105,-0.043)
  silkscreen extent -3.1,-2.94 3.31,2.96
SIP-3P-2D54-DEBUG [mm] "SIP-3P-2D54-DEBUG"
  round 1.7 hole 1: 1(-2.6,-0.25) 2(-0.06,-0.25) 3(2.48,-0.25)
  silkscreen extent -3.9,-1.55 3.9,1.55
SIP-4P-2D0 [mm] "SIP-4P-2D0"
  round 1.2 hole 0.8: 1(-3,-0.05) 2(-1,-0.05) 3(1,-0.05) 4(3,-0.05)
  silkscreen extent -5.25,-2.95 5.25,2.95
SO-8-A [mm] "SO-8-A"
  oval 0.599x1.501 smd: 1(-1.905,-3) 2(-0.635,-3) 3(0.635,-3) 4(1.905,-3) 5(1.905,3) 6(0.635,3) 7(-0.635,3) 8(-1.905,3)
  rect 3.4x3.4 smd: 9(0,0)
  silkscreen extent -2.5,-2 2.5,2
SOD-323 [mil] "SOD-323"
  rect 39.4x39.4 smd: 1(-51.2,-0.2) 2(51.2,-0.2)
  silkscreen extent -26,-27 25,27
SOT23-5 [mil] "SOT23-5"
  rect 39.4x23.6 smd: 1(59.1,-39.4) 2(59.1,0) 3(59.1,39.4) 4(-59.1,39.4) 5(-59.1,-39.4)
  silkscreen extent -32,-63 32,63
SOT23-6 [mil] "SOT23-6"
  rect 40x23.6 smd: 1(59.1,-39.4) 2(59.1,0) 3(59.1,39.4) 4(-59.1,39.4) 5(-59.1,0) 6(-59.1,-39.4)
  silkscreen extent -32,-63 32,63
SOT-23 [mm] "SOT-23"
  rect 0.8x1 smd: 1(-0.95,-1.3) 2(0.95,-1.3) 3(0,1.3)
  silkscreen extent -1.5,-0.61 1.5,0.66
TS-037-DIP [mm] "TS-037-DIP"
  round 1.65 hole 1: 1(2.3,3.2) 2(-2.3,3.2) 3(2.3,-3.2) 4(-2.3,-3.2)
  silkscreen extent -3,-3 3,3
TS-039 [mm] "TS-039"
  round 1.8 hole 1: 1(-2.25,1) 2(2.25,1)
  round 2.3 hole 1.3: 3(-3.5,3.5) 4(3.5,3.5)
  silkscreen extent -3.8,-1.9 3.7,6
ULLGA6_1P45X1_0P5MM [mm] "ULLGA6_1P45X1_0P5MM"
  rect 0.3x0.5 smd: 1(0.5,0.365) 2(0,0.365) 3(-0.5,0.365) 4(-0.5,-0.365) 5(0,-0.365) 6(0.5,-0.365)
  silkscreen extent -0.75,-0.5 1.22,0.62
USB-A [mil] "USB-A"
  round 62.99 hole 40: 1(137.5,-241.5) 2(39.5,-241.5) 3(-38.5,-241.5) 4(-136.5,-241.5)
  round 120 hole 90.55: 5(-257.5,-135.5) 6(258.5,-135.5)
  silkscreen extent -246,-242 246,272
VH3.96*2 [mm]
  rect 3x3 hole 1.9: 1(0,0)
  round 3 hole 1.9: 2(3.96,0)
  silkscreen extent -2,-2.92 5.97,5.08
WK2124 [mm] "WK2124"
  oval 0.35x1.5 smd: 1(-2.758,-3.601) 2(-2.118,-3.601) 3(-1.478,-3.601) 4(-0.838,-3.601) 5(-0.198,-3.601) 6(0.442,-3.601) 7(1.082,-3.601) 8(1.722,-3.601) 9(2.362,-3.601) 10(3.003,-3.601) 11(3.003,3.601) 12(2.362,3.601) 13(1.722,3.601) 14(1.082,3.601) 15(0.442,3.601) 16(-0.198,3.601) 17(-0.838,3.601) 18(-1.478,3.601) 19(-2.118,3.601) 20(-2.758,3.601)
  silkscreen extent -3.81,-3.72 3.8,2.7
Y3025#1 [mil] "Y3025"
  rect 40x35 smd: 1(44.66,31.5) 2(-41.34,31.5) 3(-41.34,-30.5) 4(44.66,-31.5)
  silkscreen extent -69,-57 72,83
Y3025#2 [mil] "Y3025"
  rect 40x35 smd: 1(44.66,-31.5) 2(-41.34,-31.5) 3(-41.34,30.5) 4(44.66,31.5)

## Part data
C2 C3 C5 C7: library part C1005_0
C6 C16 C205 C206 C231: library part "CAP NP_3", "CAP,MLCC,100nF,+/-10%,X7R,6.3V,SMD0402"
C8 C10 C168 C170: library part "CAP NP_Dup2", "cap,100.00nF,+/-10%,25V,X5R,C0402"
C9 C22 C25 C26 C31 C134 C135 C136 C169 C210 C216 C230 C232: library part "CAP NP_Dup8"
C11 C171: library part "CAP NP_Dup2", "cap,100.00pF,+/-5%,50V,C0G,C0402"
C12 C172 C207 C209 C214: library part "CAP NP_Dup2", "cap,22.00uF,+/-10%,10V,X5R,C0805"
C13 C173 C200: library part "CAP NP_Dup2", "cap,10.00uF,+/-10%,10V,X5R,C0805"
C14 C174 C201 C202: library part "CAP NP_Dup2", "cap,100.00nF,+/-10%,16V,X5R,C0402"
C15: library part 02CAPP
C17 C18 C20 C21: library part "CAP NP_Dup5"
C19: library part CAP_Dup1
C23 C24 C203 C204: library part "CAP NP_3_Dup1"
C40 C41 C42 C50 C52 C60: library part "CAP NP_Dup6", "RoHS CHIP CAP 0.1uF +10/-10% X7R"
C44: library part "SMALL CAP", "CAP,MLCC,4.7uF,+/-10%,X5R,6.3V,SMD0603"
C45 C46: library part "SMALL CAP", "CAP,MLCC,1uF,+/-10%,X5R,6.3V,SMD0402"
C48 C49 C53 C56: library part "SMALL CAP", "CAP,MLCC,2.2uF,+/-10%,X5R,6.3V,SMD0603"
C65 C66: library part "CAP NP_Dup6", "RoHS CHIP CAP 0.47uF +10/-10% X5R"
C143 C144 C146 C154 C155 C157 C158: library part CAPNP_Dup1_1
C145 C150: library part "CAP NP", "CAP,MLCC,8pF,+/-0.5pF,NPO,6.3V,SMD0402"
C156: library part "CAP NP_Dup6", "CAP,MLCC,100nF,+/-10%,X7R,6.3V,SMD0402"
C159: library part "CAP NP", "CAP,MLCC,4.7uF,+/-10%,X5R,6.3V,SMD0603"
C160: library part "CAP NP", "CAP,MLCC,100nF,+/-10%,X7R,6.3V,SMD0402"
C198: library part CAP_NP, "CAP CER 0.22UF 6.3V 20% X5R 0201"
C199: library part CAP_NP, "CAP CER 0.22UF 10V 20% X5R 0201"
D1 D3 D10 D11: library part DIODE_Dup2
D2 D12 D14 D15: library part DIODE_Dup1
D4: library part LED
ED1 ED2 ED3 ED4 ED5 ED6 ED7 ED8 ED9 ED10 ED11 ED12 ED13: library part "DIODE BI-DIR TRIG"
J2 J3 J4 J5: library part CON40_0
J7 SW: "Header, 2-Pin"
J8: library part CON10_0
J10: library part CON4_0_Dup1
J12 J15 J16 J41 J43 J44 J45: library part CON4
J14: library part USB_A_1
J22: library part "PHONEJACK STEREO SW_2"
J27: library part CON20_5
J30: library part CON3_1
J42: library part CON4_1
J46: library part "CONN JACK PWR_0_Dup1"
K1: library part KEYB_0
K2: library part KEYB_1
L1: library part VLS252012E_0
L2 L5 L7 L8: library part "INDUCTORS OF FERRITE", "Power Inductor,3.3uH,0.2,IND_404030"
L4: library part INDUCTOR_1_Dup1, "CoilInd,Shielded(SHLD),2.2uH@100KHz,+/-30%,1.09A,110mOhm,SMD,3.0*3.0*1.0"
Q1 Q2: library part NPN_1
Q10: library part 2N6756_0
Q43: library part APM2301
R1 R7 R11 R144 R145 R146: library part R_Dup1
R2: library part RESISTOR_5, "通用厚膜电阻,10K,+/-5%,R0402,1/16W."
R3 R4 R9 R151: library part R1005_0_Dup1
R5: library part "RES 1B", "ROHS CHIP RES 4.7Ohm 1/8W +/-5%"
R6 R127: library part RESISTOR_Dup1, "通用厚膜电阻,75K,+/-1%,R0402,1/16W."
R8 R128 R129: library part RESISTOR_Dup1, "通用厚膜电阻,10K,+/-1%,R0402,1/16W."
R10: library part RES, "RES MF 10.0K 1/16W 1% 0402"
R12: library part 01RES
R13 R15 R16 R17 R18: library part R_1
R14 R143: library part RES_0
R29 R32 R33: library part RESISTOR, "ROHS CHIP RES 33R 1/16W 5%"
R35 R36: library part RESISTOR, "ROHS CHIP RES 1K 1/16W 5%"
R40 R41: library part "RES 1B", "ROHS CHIP RES 22Ohm 1/16W +/-5%"
R42 R43 R44 R45 R46: library part "RES 1B", "ROHS CHIP RES 470Ohm 1/16W +/-5%"
R107 R108 R109 R110 R111: library part RESISTOR_Dup2, "ROHS CHIP RES 10K 1/16W +/-5%"
R112: library part R_0
R113 R114 R115 R116 R117 R118 R119 R120: library part RESISTOR_Dup2, "RES,thick film,33Ohm,+/-5%,1/16W,SMD0402"
R121 R122 R123 R124 R125: library part RESISTOR_1
RTC1: library part BATTERY_5
U1: library part MP2482DN_1
U2 U20: library part DCDC_SY8113
U4: library part FE1_1s_SSOP28_1
U8: library part ALC5651_3
U17: library part XC6219_2
U19: library part AP6493_1
U22: library part NLSV1T34, "IC VXLTR 1 BIT DUAL-SUPPLY 0.9-4.5V 613AF"
Y1 Y4: library part CRYSTAL_2
Y3: library part CRYSTAL-4_4, "Crystal,37.400MHz,+/-20ppm,12pF,SMD3225,-10°C ~ +60   °C"

## Via types
v1: diameter 15, hole 10, TOP to BOTTOM, 127 vias
v2: diameter 40, hole 20, TOP to BOTTOM, 86 vias
v3: diameter 20, hole 10, TOP to BOTTOM, 79 vias

## Nets (pads, with @x,y where several pads share a name; then routed paths per layer and width w, separated by ;. In a path a pad name is that pad's centre, name@x,y a point inside that pad or via, vN(x,y) a via of type N, cw(c..) or ccw(c..) an arc to the next point about the centre after c; other vN are vias at no path point)
3G_EN: J2.73 R128.1 U20.4 | length 4073.4
  TOP w10: v3(55455,34443) 55482.45,34415.55 J2.73@55530.2,34415.55
  TOP w20: U20.4@52331.9,34357.4 v3(52331.9,34405) 52331.9,34429.84 R128.1@52362,34459.94
  BOTTOM w10: v3(52331.9,34405) 52618,34405 52669,34354 52669,34156 52820,34005 53237,34005 53458,33784 54210,33784 54534,34108 55295,34108 55455,34268 v3(55455,34443)
5V_EN: J3.49 R7.2 U2.4 | length 6008.3
  TOP w10: U2.4@51752.4,34342.1 51828.97,34342.1 R7.2@51853.06,34318 51938,34318 v1(51940,34320) ; v1(55375.08,34513.92) 55375.08,35796.92 55432.69,35854.53 J3.49@55530.2,35854.53
  BOTTOM w10: v1(51940,34320) 52123,34320 52287,34484 52623,34484 52702,34405 52702,34156 52820,34038 53237,34038 53458,33817 54210,33817 54527,34134 55224.08,34134 55375.08,34285 v1(55375.08,34513.92)
#HPO_L: C65.2 R40.2 U8.23 | length 782.1
  TOP w10: U8.23@53158.79,34452.89 53158.79,34410.21 53173,34396 53290,34396 53341,34345 53341,34064.06 R40.2@53435.06,33970 ; R40.2@53437.06,33980 53542,33980 C65.2@53550,33988
#HPO_R: C66.2 R41.2 U8.21 | length 701
  TOP w10: C66.2@52815,33980 52925.06,33980 R41.2@52935.06,33970 52935.06,34072.06 53043,34180 53043,34363 53063,34383 53093,34383 53119.42,34409.42 U8.21@53119.42,34452.89
ADC2: J4.38
ADC_IN0: J2.1
ADC_IN3: J2.2
ADC_IN4: J2.3
ADKEY_IN: D3.2 J2.4 R5.1 | length 3025.8
  TOP w10: J2.4@55742.8,34336.81 55794.81,34336.81 55806,34348 55806,34477 55866,34537 56225,34537 56243,34555 56243,36083 56154,36172 55898,36172 55862.06,36207.94 R5.1@55862.06,36495
  TOP w20: R5.1@55862.06,36495 D3.2@55973.94,36495
ANT: C144.1 C146.1 U19.2 | length 192.1
  TOP w20: C146.1@53051,35987 C144.1@53161,35987 ; 53098,35984 53100.73,35981.27 U19.2@53100.73,35903.03
AUX_IN_1P: U8.4
AUX_IN_3P: U8.7
BT_HOST_WAKE: J4.71 R124.2 U19.7 | length 2343.1
  TOP w10: R124.2@52887.94,36303 52921,36269.94 v1(52921,35989) 52923.57,35986.43 U19.7@52923.57,35903.03 ; v1(53811.2,35437.2) J4.71@53862.87,35437.2
  BOTTOM w10: v1(52921,35989) 52944.5,35965.5 53959.5,35965.5 54085,35840 54085,35481 54041.2,35437.2 v1(53811.2,35437.2)
BT_RST: J4.67 R122.2 U19.34 | length 982.1
  TOP w10: v1(53149,35503) 53154.48,35497.52 U19.34@53187.35,35497.52 ; v1(53810,35516) 53810.06,35515.94 J4.67@53862.87,35515.94
  TOP w20: U19.34@53187.35,35497.52 53281.48,35497.52 53319.06,35459.94 R122.2@53319.06,35387
  BOTTOM w10: v1@53147,35503 v1(53149,35503) 53743,35503 53756,35516 v1(53810,35516)
BT_WAKE: J3.16 R125.2 U19.6 | length 3595.5
  TOP w10: U19.6@52959,35903.03 52959,36258.06 R125.2@53003.94,36303 ; v3(55632,35838) 55632,35832 55669.43,35794.57 55669.43,35558 55687.87,35539.57 J3.16@55742.8,35539.57
  BOTTOM w10: v3(52960,36044) 53391,36044 53447,35988 54010,35988 54065,35933 54201,35933 54348,35786 54832,35786 54884,35838 v3(55632,35838)
CAMERA_RST1_L: J5.36
CAMERA_RST_L: J5.35
CHG_CC_INT_L: J5.68
CIF_CLKI: J3.70
CIF_CLKO: J5.30
CIF_D0: J3.80
CIF_D1: J3.79
CIF_D2: J3.78
CIF_D3: J3.77
CIF_D4: J3.76
CIF_D5: J3.75
CIF_D6: J3.74
CIF_D7: J3.73
CIF_HREF: J3.71
CIF_VSYNC: J3.72
DVP_PDN0_H: J5.33
DVP_PDN1_H: J5.34
EDP_TX0N: J3.64
EDP_TX0P: J3.65
EDP_TX1N: J3.61
EDP_TX1P: J3.62
EDP_TX2N: J3.58
EDP_TX2P: J3.59
EDP_TX3N: J3.55
EDP_TX3P: J3.56
EDPAUXN: J3.67
EDPAUXP: J3.68
GND: C2.1 C5.1 C6.2 C7.1 C9.2 C10.2 C12.2 C13.2 C14.2 C15.2 C16.2 C17.2 C18.2 C19.2 C20.2 C21.2 C22.2 C23.2 C24.2 C25.2 C26.2 C31.2 C40.2 C41.2 C42.2 C44.1 C50.2 C52.2 C53.2 C56.2 C60.2 C134.2 C135.2 C136.2 C143.2 C145.2 C146.2 C150.1 C154.1 C155.1 C156.2 C157.1 C158.1 C159.2 C160.1 C169.2 C170.2 C172.2 C173.2 C174.2 C198.2 C199.2 C200.2 C201.2 C202.2 C203.2 C204.2 C205.2 C206.2 C207.2 C209.2 C210.2 C214.2 C216.2 C230.2 C231.2 C232.2 D2.1 D3.1 D4.2 D10.1 D11.1 D12.1 D14.1 D15.1 ED1.2 ED2.2 ED3.2 ED4.2 ED5.2 ED6.2 ED7.2 ED8.2 ED9.2 ED10.2 ED11.2 ED12.2 ED13.2 J2.5 J2.9 J2.12 J2.15 J2.18 J2.21 J2.24 J2.27 J2.30 J2.33 J2.36 J2.37 J2.38 J2.39 J2.40 J2.52 J2.57 J2.62 J2.67 J2.75 J2.78 J3.9 J3.14 J3.21 J3.33 J3.41 J3.42 J3.43 J3.44 J3.45 J3.46 J3.47 J3.48 J3.54 J3.57 J3.60 J3.63 J3.66 J3.69 J4.3 J4.6 J4.9 J4.12 J4.15 J4.18 J4.21 J4.24 J4.27 J4.33 J4.52 J4.60 J4.72 J4.80 J5.7 J5.8 J5.9 J5.10 J5.11 J5.14 J5.17 J5.20 J5.23 J5.26 J5.29 J5.31 J5.71 J5.72 J5.73 J5.74 J5.75 J7.2 J8.1 J8.2 J8.3 J8.4 J10.1 J12.4 J14.4 J15.4 J16.4 J22.1 J22.2 J27.10 J27.15 J27.16 J27.17 J30.2 J30.3 J41.4 J42.1 J43.4 J44.4 J45.4 K1.2 K2.2 L8.2 Q1.2 Q2.2 R4.2 R7.1 R8.2 R12.1 R15.2 R18.2 R42.2 R43.2 R45.2 R46.2 R120.1 R121.1 R122.1 R128.2 R129.2 RTC1.2 U1.4 U1.9 U2.2 U4.15 U8.10 U8.20 U8.41 U17.2 U19.1 U19.3 U19.20 U19.31 U19.33 U19.36 U20.2 U22.3 U23.1 U23.13 Y1.2 Y1.4 Y3.2 Y3.4 Y4.2 Y4.4 | length 18907.7
  TOP w10: U8.20@53089.89,34482.42 53119.42,34482.42 U8.41@53208,34571 53119.42,34659.58 U8.10@53119.42,34689.11 ; 53654.74,35653.74 53654,35653 ; v2(53756,34444) 53760.83,34439.17 J5.71@53862.87,34439.17 J5.72@53862.87,34419.49 J5.73@53862.87,34399.8 J5.74@53862.87,34380.12 J5.75@53862.87,34360.43 ; v1(53756,35258) v1@53756,35260.04 ; v1(53790,35398) 53809.52,35417.52 J4.72@53862.87,35417.52 ; J4.80@53862.87,35260.04 v1@53756,35260.04 ; J4.60@53862.87,35653.74 53910.74,35653.74 53935,35678 53935,35781 53904.78,35811.22 J4.52@53862.87,35811.22 53737.22,35811.22 53654,35728 53654,35653 ; 54015,35654 54015.26,35653.74 J4.21@54075.47,35653.74 ; J5.23@54073.47,34694.56 v1@54142.44,34694.56 ; J5.26@54073.47,34753.56 v1@54142.44,34753.56 ; J5.7@54075.47,34380.12 J5.8@54075.47,34399.8 J5.9@54075.47,34419.49 J5.10@54075.47,34439.17 J5.11@54075.47,34458.86 54136.86,34458.86 v1(54143,34465) ; J5.14@54075.47,34517.91 54116.91,34517.91 54136,34537 54136,34585 ; J5.17@54075.47,34576.97 54127.97,34576.97 54136,34585 ; J5.20@54075.47,34636.02 54136,34636.02 ; J5.29@54075.47,34813.19 54143.81,34813.19 v1(54144,34813) ; J5.31@54075.47,34852.56 54144.44,34852.56 v1(54145,34852) ; J4.15@54075.47,35535.63 54193.37,35535.63 v1(54194,35535) ; J4.18@54075.47,35594.68 54011.68,35594.68 54009,35592 ; J4.24@54075.47,35712.8 54009.2,35712.8 54009,35713 ; J4.27@54075.47,35771.85 54009.15,35771.85 54009,35772 ; v1(54136,35359) 54135.46,35358.46 J4.6@54075.47,35358.46 54017.54,35358.46 54009,35367 ; v1(54136,35419) 54134.52,35417.52 J4.9@54075.47,35417.52 54012.48,35417.52 54009,35421 ; v1(54136,35467) 54126.43,35476.57 J4.12@54075.47,35476.57 54012.43,35476.57 54009,35480 ; v1(54138,35300) 54137.41,35299.41 J4.3@54075.47,35299.41 54024.59,35299.41 54009,35315 54009,35367 ; v1(54158.96,35889.96) J4.33@54075.47,35889.96 54028.96,35889.96 54009,35870 54009,35772 ; C15.2@54185,34636 54136,34636.02 ; R12.1@54396.06,35422 54348,35422 54329,35441 54329,35637 54358,35666 C17.2@54411,35666 ; v1(54738,34053) 54762.19,34028.81 U23.13@54762.19,33993.24 ; U4.15@54862.71,35956.57 54973.57,35956.57 v2@55010,35993 ; v1(54898.68,34355.32) U22.3@54930.63,34355.32 ; U23.1@54938.59,34276.76 55033.24,34276.76 C198.2@55035,34275 ; v1@55461.56,34829.44 J2.52@55530.53,34829.44 ; v1@55462.56,34532.44 J2.67@55531.53,34532.44 ; v1@55462.56,34731.44 J2.57@55531.53,34731.44 ; v1@55462.56,35933.44 J3.45@55531.53,35933.44 ; v1@55463.56,34632.44 J2.62@55532.53,34632.44 ; v1@55463.56,35874.44 J3.48@55532.53,35874.44 ; J2.78@55523.47,34317.56 55592.44,34317.56 55592.44,34361.12 55577.38,34376.18 J2.75@55530.2,34376.18 ; J3.69@55530.2,35460.83 55573.83,35460.83 55584,35471 55584,35502 ; J3.66@55530.2,35519.88 55582.12,35519.88 55584,35518 ; J3.63@55530.2,35578.94 55583.94,35578.94 55584,35579 ; J3.60@55530.2,35637.99 55584,35637.99 ; J3.57@55530.2,35697.05 55583.95,35697.05 55584,35697 ; J3.54@55530.2,35756.1 55584,35756.1 ; J3.48@55530.2,35874.21 J3.47@55530.2,35893.9 J3.46@55530.2,35913.58 J3.45@55530.2,35933.27 J3.44@55530.2,35952.95 J3.43@55530.2,35972.64 J3.42@55530.2,35992.32 J3.41@55530.2,36012.01 55463.99,36012.01 55462.56,36013.44 J3.41@55531.53,36013.44 ; v1(55628,35789) 55595.1,35756.1 55584,35756.1 ; v1@55668.56,35874.44 J3.33@55737.53,35874.44 ; v1@55680.56,34493.44 J2.12@55749.53,34493.44 ; v1@55683.56,34356.44 J2.5@55752.53,34356.44 ; v1@55683.56,34434.44 J2.9@55752.53,34434.44 ; J2.21@55739.47,34670.56 v1@55808.44,34670.56 ; J2.15@55740.47,34553.56 v1@55809.44,34553.56 ; J2.18@55740.47,34612.56 v1@55809.44,34612.56 ; J2.30@55740.47,34848.56 v1@55809.44,34848.56 ; J2.33@55740.47,34907.56 55809.44,34907.56 55809.44,34955.56 55798.27,34966.73 J2.36@55742.8,34966.73 J2.37@55742.8,34986.42 J2.38@55742.8,35006.1 ; J2.24@55741.47,34730.56 v1@55810.44,34730.56 ; J2.27@55741.47,34790.56 v1@55810.44,34790.56 ; J3.9@55741.47,35403.56 v1@55810.44,35403.56 ; J2.40@55742.8,35045.47 J2.39@55742.8,35025.79 J2.38@55742.8,35006.1 ; J3.14@55742.8,35500.2 55585.8,35500.2 55584,35502 ; J3.21@55742.8,35637.99 55813.01,35637.99 55925.97,35525.03 J27.16@56030.24,35525.03 J27.15@56108.98,35525.03 ; C136.2@55881,34999 55873.9,35006.1 J2.38@55742.8,35006.1 ; 53654,35653 53654,35289 53682.96,35260.04 v1@53756,35260.04 ; 54009,35367 54009,35421 ; 54009,35421 54009,35480 ; 54009,35480 54009,35592 ; 54009,35592 54009,35713 ; 54009,35713 54009,35772 ; 54136,34585 54136,34636.02 ; 55584,35502 55584,35518 ; 55584,35518 55584,35579 ; 55584,35579 55584,35637.99 ; 55584,35637.99 55584,35697 ; 55584,35697 55584,35756.1
  TOP w20: U2.2@51713,34223.9 v1(51713,34277) ; U20.2@52450.1,34318 v2@52499,34318 ; R128.2@52452,34480 52455,34477 R129.2@52575.06,34477 ; v2(52472,34583) 52502,34553 52502,34485 ; v2(52552,35533) 52587.38,35568.38 U19.20@52730.65,35568.38 ; v2(52647,36095) 52683.16,36095 Y3.2@52687.66,36099.5 ; RTC1.2@52711.31,34858.82 52711.31,34800.69 52737,34775 v2@52819,34775 ; v2(53065,35378) 53065.3,35377.7 U19.31@53065.3,35446.33 ; v1(53065,35866) 53065.3,35866.3 U19.3@53065.3,35903.03 ; U19.33@53136.17,35446.33 53136.17,35379.83 v2(53137,35379) ; U19.1@53136.17,35903.03 53136.17,35866.83 v1(53137,35867.67) ; U19.36@53187.35,35568.38 v2(53267.62,35568.38) ; Y1.4@54626.34,35423.5 54649.34,35423.5 Y1.2@54712.34,35360.5 54715,35357.84 v2(54715,35271) ; Y4.2@54858.66,33796.5 54881.66,33796.5 Y4.4@54944.66,33733.5 54944.66,33702.34 54956,33691 55145,33691 ; U17.2@56009.1,34743 56072,34743 C134.2@56103,34774 ; J10.1@56038.76,34030.33 56038.76,34088.76 56068,34118 56123,34118 56151.4,34146.4 Q1.2@56151.4,34203.82
  TOP w30: v2@51453,33813 D12.1@51453,33954.3
  TOP w40: v2(51411,34424) 51412,34423 C10.2@51503,34423 ; v2(51552,35325) 51550,35327 51550,35410 C2.1@51655,35410 51800,35410 U1.9@51825,35435 51900,35360 U1.4@51900,35316.9 ; ED1.2@51812,35767.94 51903,35767.94 51905.06,35770 v2@51905.06,35847 ; R7.1@51853.06,34228 v2(51960,34228) 52011,34279 C170.2@52190,34279 ; C9.2@51885,34440 51956,34440 v2(51966,34430) ; v2(51905,35847) v2@51905.06,35847 ; C232.2@51917.31,35955 51905.06,35942.76 v2@51905.06,35847 ; 51970,36330 51976.06,36323.94 R121.1@52226,36323.94 ; C7.1@51978,35207 v2(52061,35207) ; R8.2@52029.94,33999 D14.1@52190,33999 ; C216.2@52040,34942.34 52153.34,34942.34 v2(52154,34943) ; v2(52548,35989) 52549,35988 C150.1@52549,36052 ; C159.2@52575,36304 C160.1@52676,36304 C156.2@52777,36304 v2@52777,36221 ; v2@52589,35104 C157.1@52589,35191 C154.1@52691,35191 52884,35191 C158.1@52896,35179 ; Y3.4@52773.66,36162.5 C145.2@52868.5,36162.5 ; v2(52776,36221) v2@52777,36221 ; Y3.4@52777,36165.84 v2@52777,36221 ; C56.2@52819,34361 52819,34289 52821,34287 v2(52821,34285) ; C44.1@52819,34686 v2@52819,34775 ; v2(52961,34906) 52962,34905 C50.2@53030,34905 ; C146.2@53051,36087 53054,36090 v2@53054,36205 ; v2(53153,36351) 53153.9,36350.1 J30.3@53153.9,36265.35 ; R120.1@53201,35289.06 53199.06,35291 53313.06,35291 R122.1@53319.06,35297 53319.06,35196.94 v2(53321,35195) ; v2@53226,34359 C53.2@53226,34303 53226,34184 C41.2@53230,34180 ; C143.2@53266,35987 53340,35987 v2(53363,36010) ; J30.2@53270.1,36265.35 53270.1,36352.1 v2(53272,36354) ; C40.2@53350,34905 C52.2@53453,34905 ; ED12.2@53352,36477 C31.2@53558,36477 53726,36477 v2(53728,36475) ; v2(53451,35008) 53451,34907 C52.2@53453,34905 ; C52.2@53454,34904 C52.2@53453,34905 ; C42.2@53540,34255 53724,34255 53759,34290 v2@53759,34292 ; v2(53951,36477) ED8.2@54021,36477 ; v2(54185,34231) C16.2@54185,34300 ; C15.2@54185,34636 54248,34636 v2(54251,34639) ; ED9.2@54221,36472 ED10.2@54318,36472 ; v2(54318,36381) ED10.2@54318,36472 ; ED10.2@54318,36477 ED10.2@54318,36472 ; v2(54368,36074) 54369,36075 C20.2@54445,36075 ; R12.1@54396.06,35422 C23.2@54511,35422 v2(54511,35297) ; C26.2@54407,36477 54412,36472 ED10.2@54318,36472 ; v2(54615,34510) 54617,34508 C202.2@54715,34508 C200.2@54820,34508 ; C204.2@54665,33760 54665,33573 54696.03,33541.97 J43.4@54749.57,33541.97 ; R15.2@54670.06,36170 54674,36173.94 v2(54674,36296) ; v2(54704,36480) 54707,36483 54780,36483 54780,36491 54788,36483 C25.2@55085,36483 ED5.2@55268,36483 ; v2(54833,35299) 54831,35299 C24.2@54831,35427 54935.94,35427 R18.2@54940.94,35432 ; C18.2@54960,35666 C21.2@55065,35666 55168,35666 55197,35695 v2(55197,35792) ; v2@55010,35993 C19.2@55010,36080 ; C198.2@55035,34275 C201.2@55035,34175 55110,34175 v2(55111,34176) ; C199.2@55040,34510 55104,34510 v2(55105,34511) ; C203.2@55145,33755 55145,33691 55145,33587.88 J45.4@55190.91,33541.97 ; ED6.2@55427.81,36483 C22.2@55631.44,36483 55700,36483 v2(55706,36477) ; D11.1@55724.8,33731.2 v2(55774,33731.2) D10.1@55819.8,33731.2 ; D3.1@55973.94,36585 56045,36585 v2(56048,36582) ; C135.2@56004,34602 56183,34602 v2(56184,34603) ; C134.2@56103,34774 56194,34774 v2@56194,34837
  other v1: 55593,34317 55683,34357 55683,34435 55680,34494 55462,34533 55810,34553 55810,34612 55463,34633 55809,34670 54143,34694 55811,34730 55462,34732 54143,34753 55811,34790 55461,34830 55810,34848 55810,34907 55811,35403 55463,35875 55668,35875 55462,35934 55462,36014
  other v2: 53475,33571 53379,33572 53572,33574 52906,33576 52827,33577 52985,33577 51591,33640 51732.29,33640 51873.57,33640 52014.86,33640 52156.14,33640 52297.43,33640 52438.71,33640 52580,33641 51450,33815 52104,33999 53760,34293 52498,34315 53225,34359 53204,34578 52021,34583 52111.2,34583 52201.4,34583 52291.6,34583 52381.8,34583 52820,34775 56191,34840 52583,35110 55012,35991 51917,36021 51917,36078 51542,36097 51584,36097 53056,36198 51917,36287 51917,36344
GPIO0_B0: J3.15 Q10.2 R144.2 | length 3150.8
  TOP w10: v3(54301,34214) 54301,34300.06 R144.2@54301.94,34301 54380.42,34301 Q10.2@54408.82,34272.6 ; J3.15@55742.8,35519.88 55841.12,35519.88 55859,35502 v3(55859,35468)
  BOTTOM w10: v3(54301,34214) 54358,34157 54954,34157 55000,34203 55000,35185 55070,35255 55795,35255 55859,35319 v3(55859,35468)
GPIO0_B5: J3.17
GPIO1_A1: J3.18
GPIO1_C2: J2.43 R10.2 | length 1241.5
  TOP w10: J2.43@55530.2,35006.1 55640.9,35006.1 55654,34993 55654,34208 55680,34182 55832,34182 55887,34237 R10.2@55887,34297.7
GPIO1_C4: J3.19
GPIO1_C6: J2.41 J27.8 | length 778.1
  TOP w10: v1(55449,35046) 55449.53,35045.47 J2.41@55530.2,35045.47
  BOTTOM w10: v1(55449,35046) 55843,35046 55879,35082 55879,35163 55926.07,35210.07 J27.8@56030.24,35210.07
GPIO1_C7: J2.8
GPIO4_C5_3V: J5.37
GPIO4_D0_3V: J5.38 R11.1 | length 3462.4
  TOP w10: v3(51464,35718) 51543.06,35718 R11.1@51550.06,35725 ; v3(53991,34991) 53990.35,34990.35 J5.38@54075.47,34990.35
  BOTTOM w10: v3(51464,35718) 51600,35718 51649,35669 51649,35025 51691,34983 53164,34983 53263,35082 53830,35082 53921,34991 v3(53991,34991)
GPIO4_D2_3V0: J3.20
GPIO4_D5_3V: J3.50 U23.8 | length 2248.8
  TOP w10: v3(54761,34329) 54762.19,34327.81 U23.8@54762.19,34276.76 ; v3(55409,35423) 55409,35803 55440.84,35834.84 J3.50@55530.2,35834.84
  BOTTOM w10: v3(54761,34329) 54761,35320 54861,35420 55406,35420 v3(55409,35423)
HDMI_CEC: J4.77
HDMI_TX0N: J5.41
HDMI_TX0P: J5.42
HDMI_TX1N: J5.43
HDMI_TX1P: J5.44
HDMI_TX2N: J5.45
HDMI_TX2P: J5.46
HDMI_TXCN: J4.78
HDMI_TXCP: J4.79
HOST0_DM: ED6.1 J2.76 J12.2 | length 2865.4
  TOP w10: 55338,36594 55395,36651 55429,36651 ; 55338,36595 55338,36354 55338,36304.5 ccw(c55343.5,36304.5) 55343.5,36299 55415.49,36299 cw(c55415.49,36293.5) 55420.99,36293.5 55420.99,36194.5 cw(c55415.49,36194.5) 55415.49,36189 55343.5,36189 ccw(c55343.5,36183.5) 55338,36183.5 55338,36152 55338,34501 55482.5,34356.5 J2.76@55530.2,34356.5 ; ED6.1@55427.61,36581.2 55427.61,36649.61 55429,36651 ; J12.2@55559.5,36718.5 55559.5,36685.5 55525,36651 55429,36651
HOST0_DP: ED5.1 J2.77 J12.3 | length 2881.8
  TOP w10: ED5.1@55249.8,36581.2 55303.2,36581.2 55310,36588 ; J12.3@55481.5,36718.5 55481.5,36787.5 55462,36807 55366,36807 55310,36751 55310,36588 ; J2.77@55530.2,34336.81 55459.19,34336.81 55310,34486 55310,36588
HOST1_DM: J2.79 U4.25 | length 2426.9
  TOP w10: U4.25@54606.8,35956.57 54606.8,35883.04 54628.84,35861 55223,35861 55283,35801 55283,34481 55466.56,34297.44 J2.79@55530.2,34297.44
HOST1_DP: J2.80 U4.26 | length 2456.7
  TOP w10: U4.26@54581.21,35956.57 54581.21,35880.79 54617,35845 55192,35845 55254,35783 55254,34472 55448.24,34277.76 J2.80@55530.2,34277.76
HP_DET_H: C60.1 J4.36 R35.2 R36.2 | length 2598.7
  TOP w10: R35.2@53540,34134.94 53709.06,34134.94 53749,34095 ; R36.2@53645,33880.94 53722.94,33880.94 53749,33907 53749,34095 ; J4.36@54075.47,35949.02 54038.02,35949.02 53963,35874 53963,34268 53878,34183 53777,34183 53749,34155 53749,34095
HUB_5V: C11.1 C12.1 C13.1 C14.1 C19.1 C20.1 C22.1 C25.1 C26.1 C31.1 C207.1 C214.1 ED4.1 ED7.1 ED10.1 ED11.1 J12.1 J14.1 J15.1 J16.1 J27.1 L2.2 Q43.3 R6.1 R13.2 R17.2 R151.1 U4.23 | length 1908.5
  TOP w10: v1(54658,35893) U4.23@54657.98,35956.57
  TOP w20: J16.1@53535.22,36718.5 53535.22,36599.78 C31.1@53558,36577 ED11.1@53661,36577 ; J15.1@54242.64,36718.5 54392.5,36718.5 54419,36692 C26.1@54419,36579 54417,36577 ED10.1@54318,36577 ; v3@54356,36168 54358,36170 R13.2@54560.06,36170 ; R17.2@54895.06,36170 55091,36170 v3@55092,36171 ; J14.1@54950.07,36718.5 54984,36684.57 54984,36583 54985,36584 C25.1@55085,36584 ; ED7.1@55529.63,36583 C22.1@55631.44,36583 55657.5,36609.06 J12.1@55657.5,36718.5 ; R151.1@55887,34415.94 55887,34474 55900.18,34487.18 Q43.3@56111,34487.18
  other v3: 51569,33876 51595.5,33876 51622,33876 51648.5,33876 51675,33876 51701.5,33876 51728,33876 51806,33878 51833,33878 51860,33878 51887,33878 51914,33878 51941,33878 51805,33935 51832,33935 51859,33935 51886,33935 51913,33935 51940,33935 55932,34487 55992,34487 56046,34487 55090,36169 54357,36171
HUB_RST: J2.74 R18.1 U4.13 | length 2216.2
  TOP w10: U4.13@54837.12,35653.43 54837.12,35602.88 54865,35575 54930,35575 54940.94,35564.06 R18.1@54940.94,35522 55156,35522 55217,35461 55217,34451 55424,34244 55588,34244 55615,34271 55615,34375 55594.13,34395.87 J2.74@55530.2,34395.87
I2C1_SCL: J4.50 U8.35 | length 1975.9
  TOP w10: U8.35@53326.11,34561.16 53524.16,34561.16 v1(53537,34574) ; v1(53770,34576) 53770,34943.37 53617,35096.37 53617,35751.63 53715.96,35850.59 J4.50@53862.87,35850.59
  BOTTOM w10: v1(53537,34574) 53768,34574 v1(53770,34576)
I2C1_SDA: J4.51 U8.36 | length 1944.5
  TOP w10: U8.36@53326.11,34580.84 53505.84,34580.84 v1(53537,34612) ; v1(53791,34610) 53791,34945 53633,35103 53633,35745 53718.91,35830.91 J4.51@53862.87,35830.91
  BOTTOM w10: v1(53537,34612) 53789,34612 v1(53791,34610)
I2C4_SCL: J2.44 J27.11 | length 1196
  TOP w10: v1(55418,34986) 55418.42,34986.42 J2.44@55530.2,34986.42
  BOTTOM w10: v1(55418,34986) 55887.57,34986 55931.28,35029.72 55931.28,35058.28 55967,35094 56138,35094 56158,35114 56158,35318.53 J27.11@56108.98,35367.55
I2C4_SDA: J2.45 J27.12 | length 1362.6
  TOP w10: v1(55449.27,34966.73) J2.45@55530.2,34966.73
  BOTTOM w10: v1(55449.27,34966.73) 55918.84,34966.73 55966,35013.9 55966,35014 56145,35014 56185,35054 56185,35381 56158,35408 56070.69,35408 J27.12@56030.24,35367.55
I2C_SCL_HDMI: J4.75
I2C_SDA_HDMI: J4.76
I2S0_LRCK_RX: J4.42 J4.43 U8.32 | length 2197.9
  TOP w10: U8.32@53326.11,34502.1 53428.9,34502.1 53474,34457 v1(53474,34452) ; v1(53681,34694) 53656.56,34718.44 53656.56,34959.37 53519.56,35096.37 53519.56,35768.54 53739.41,35988.39 J4.43@53862.87,35988.39 J4.42@53862.87,36008.07
  BOTTOM w10: v1(53474,34452) 53474,34663 53505,34694 v1(53681,34694)
I2S0_SCLK: J4.48 R32.1 | length 1782.8
  TOP w10: R32.1@53672.06,34380.06 53711,34419 53711,34952.37 53585,35078.37 53585,35764.88 53710.08,35889.96 J4.48@53862.87,35889.96
I2S0_SDI0: J4.41 U8.30 | length 2226.2
  TOP w10: U8.30@53296.58,34452.89 53296.58,34428.42 53324,34401 v1(53438,34401) ; v1(53596,34546) 53633,34583 53633,34952.81 53493.81,35092 53493.81,35775.17 53746.4,36027.76 J4.41@53862.87,36027.76
  BOTTOM w10: v1(53438,34401) 53545,34401 53596,34452 v1(53596,34546)
I2S0_SDO0: J4.44 U8.31 | length 2128
  TOP w10: U8.31@53326.11,34482.42 53403.58,34482.42 v1(53435,34451) ; v1(53686,34737) 53686,34952.56 53535.56,35103 53535.56,35761.91 53742.35,35968.7 J4.44@53862.87,35968.7
  BOTTOM w10: v1(53435,34451) 53435,34684 53488,34737 v1(53686,34737)
I2S0_SDO1: J4.45
I2S0_SDO2: J4.46
I2S0_SDO3: J4.47
I2S1_LRCK_RX: J4.31
I2S1_LRCK_TX: J4.32
I2S1_SCLK: J4.30
I2S1_SDI0: J4.34
I2S1_SDO0: J4.35
I2S_CLK: J4.49 R33.1 | length 1713.4
  TOP w10: R33.1@53652,34477.06 53652,34628 v1(53677,34653) ; v1@53738,34655 53738,34948 53601,35085 53601,35758.25 53713.02,35870.28 J4.49@53862.87,35870.28
  BOTTOM w10: v1(53677,34653) 53733,34653 v1(53735,34655)
IR_RX: J5.70
LCD_BL_PWM: J3.53 J27.3 | length 1374.8
  TOP w10: J3.53@55530.2,35775.79 55470.79,35775.79 55458,35763 55458,35162 55489,35131 55590,35131 55627,35094 56065,35094 56106.41,35052.59 J27.3@56108.98,35052.59
LCD_EN: J3.52 J27.18 U17.3 | length 2248.2
  TOP w10: J3.52@55530.2,35795.47 55569.94,35795.47 55584.47,35810 55584.47,36002.47 55640,36058 55896,36058 55946,36008 55946,35688.01 J27.18@56030.24,35603.77 56066.47,35640 56154,35640 56187,35607 56187,34904 56165.5,34882.5 56050.5,34882.5 56009.1,34841.1 U17.3@56009.1,34782.4
LCD_RST: J3.51 J27.4 | length 1391.2
  TOP w10: J3.51@55530.2,35815.16 55469.16,35815.16 55435,35781 55435,35124 55488,35071 56011.83,35071 J27.4@56030.24,35052.59
LOUTL_P: U8.12
LOUTR_N: U8.13
MAC_CLK: J3.22
MAC_MDC: J3.25
MAC_MDIO: J3.24
MAC_RXCLK: J3.35
MAC_RXD0: J3.39
MAC_RXD1: J3.38
MAC_RXD2: J3.37
MAC_RXD3: J3.36
MAC_RXDV: J3.40
MIC1N: C46.1
MIC1P: C45.1
MICBIAS1: U8.2
MIPI_RX0_CLKN: J5.21
MIPI_RX0_CLKP: J5.22
MIPI_RX0_D0N: J5.15
MIPI_RX0_D0P: J5.16
MIPI_RX0_D1N: J5.18
MIPI_RX0_D1P: J5.19
MIPI_RX0_D2N: J5.24
MIPI_RX0_D2P: J5.25
MIPI_RX0_D3N: J5.27
MIPI_RX0_D3P: J5.28
MIPI_TX0_CLKN: J4.14 J27.20 | length 2023.8
  TOP w10: J4.14@54075.47,35515.94 54133.94,35515.94 v1(54134,35516)
  BOTTOM w10: v1(54134,35516) 55848,35516 56014.51,35682.51 J27.20@56030.24,35682.51
MIPI_TX0_CLKP: J4.13 J27.19 | length 2112.4
  TOP w10: J4.13@54075.47,35496.26 54157.74,35496.26 v1(54158,35496)
  BOTTOM w10: v1(54158,35496) 55860,35496 56006,35642 56071,35642 56108.98,35679.98 J27.19@56108.98,35682.51
MIPI_TX0_D0N: J4.17 J27.22 | length 2059.4
  TOP w10: J4.17@54075.47,35575 v1(54134,35575)
  BOTTOM w10: v1(54134,35575) 55825,35575 55940,35690 55940,35737 55964.25,35761.25 J27.22@56030.24,35761.25
MIPI_TX0_D0P: J4.16 J27.21 | length 2136
  TOP w10: J4.16@54075.47,35555.31 54156.31,35555.31 v1(54157,35556)
  BOTTOM w10: v1(54157,35556) 55845,35556 55956,35667 55956,35687 55990,35721 56078,35721 56108.98,35751.98 J27.21@56108.98,35761.25